# EAGLE board motherboard (EAGLE 7.7.0), part 1 of 3
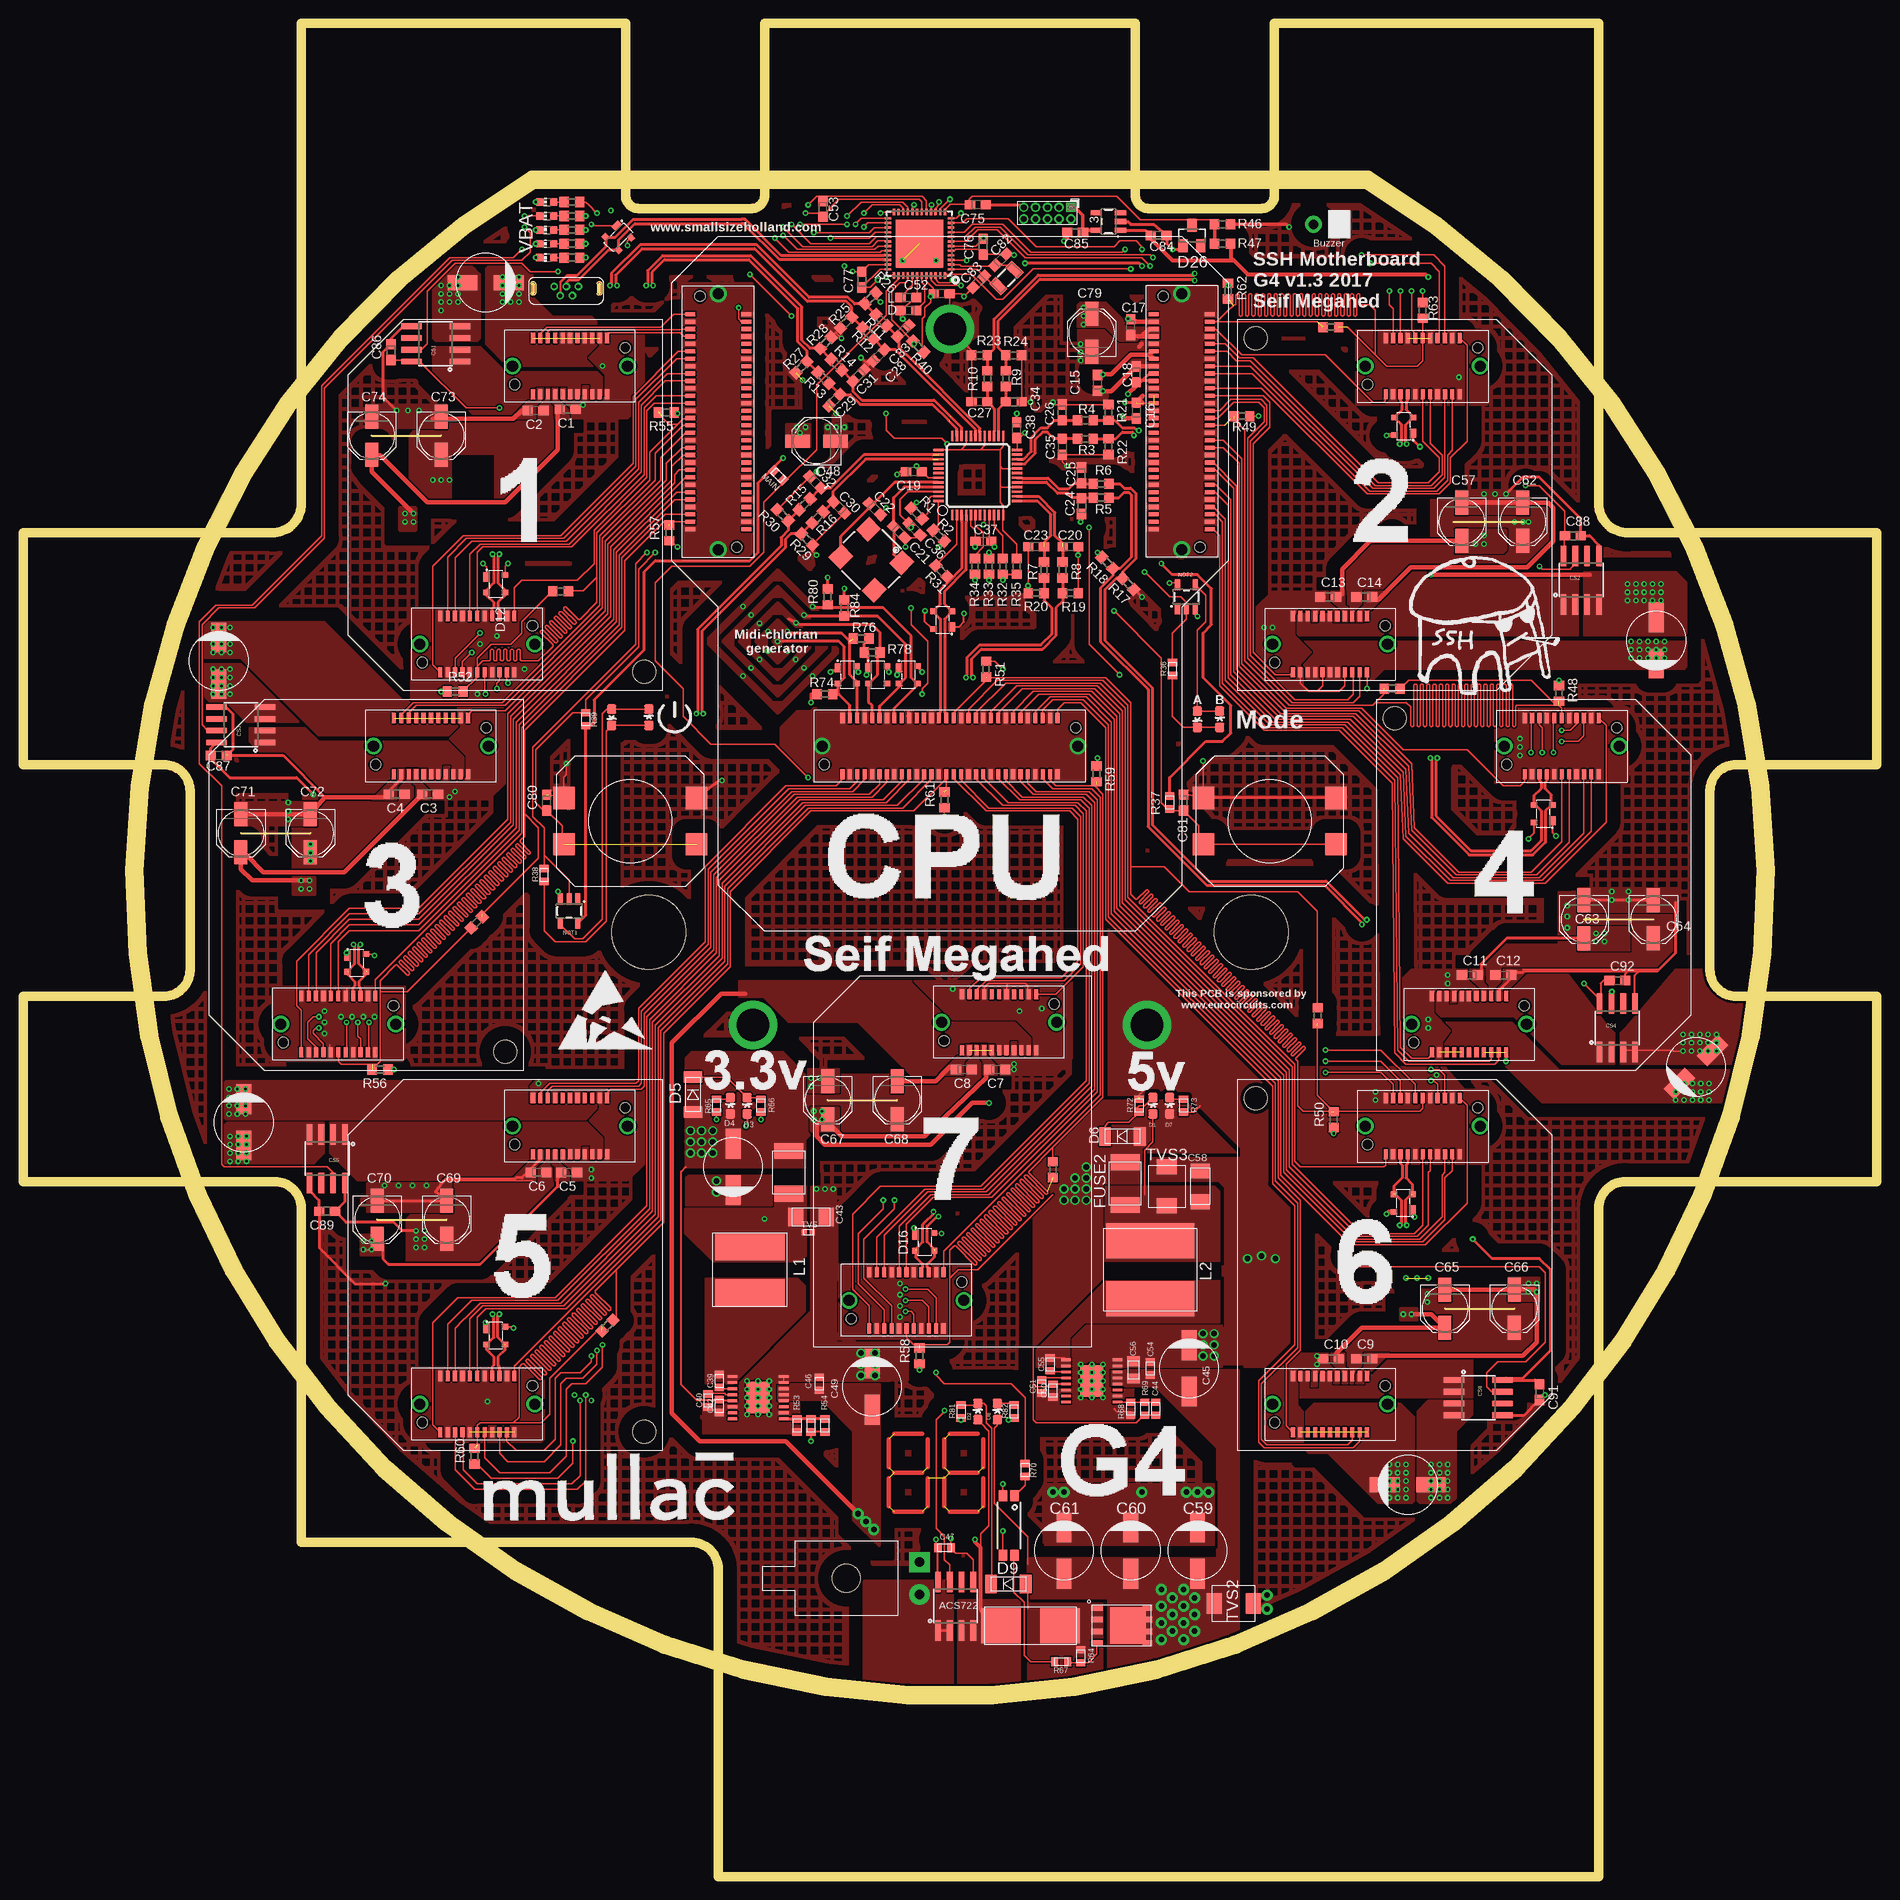
[diagram p0: board, top side]
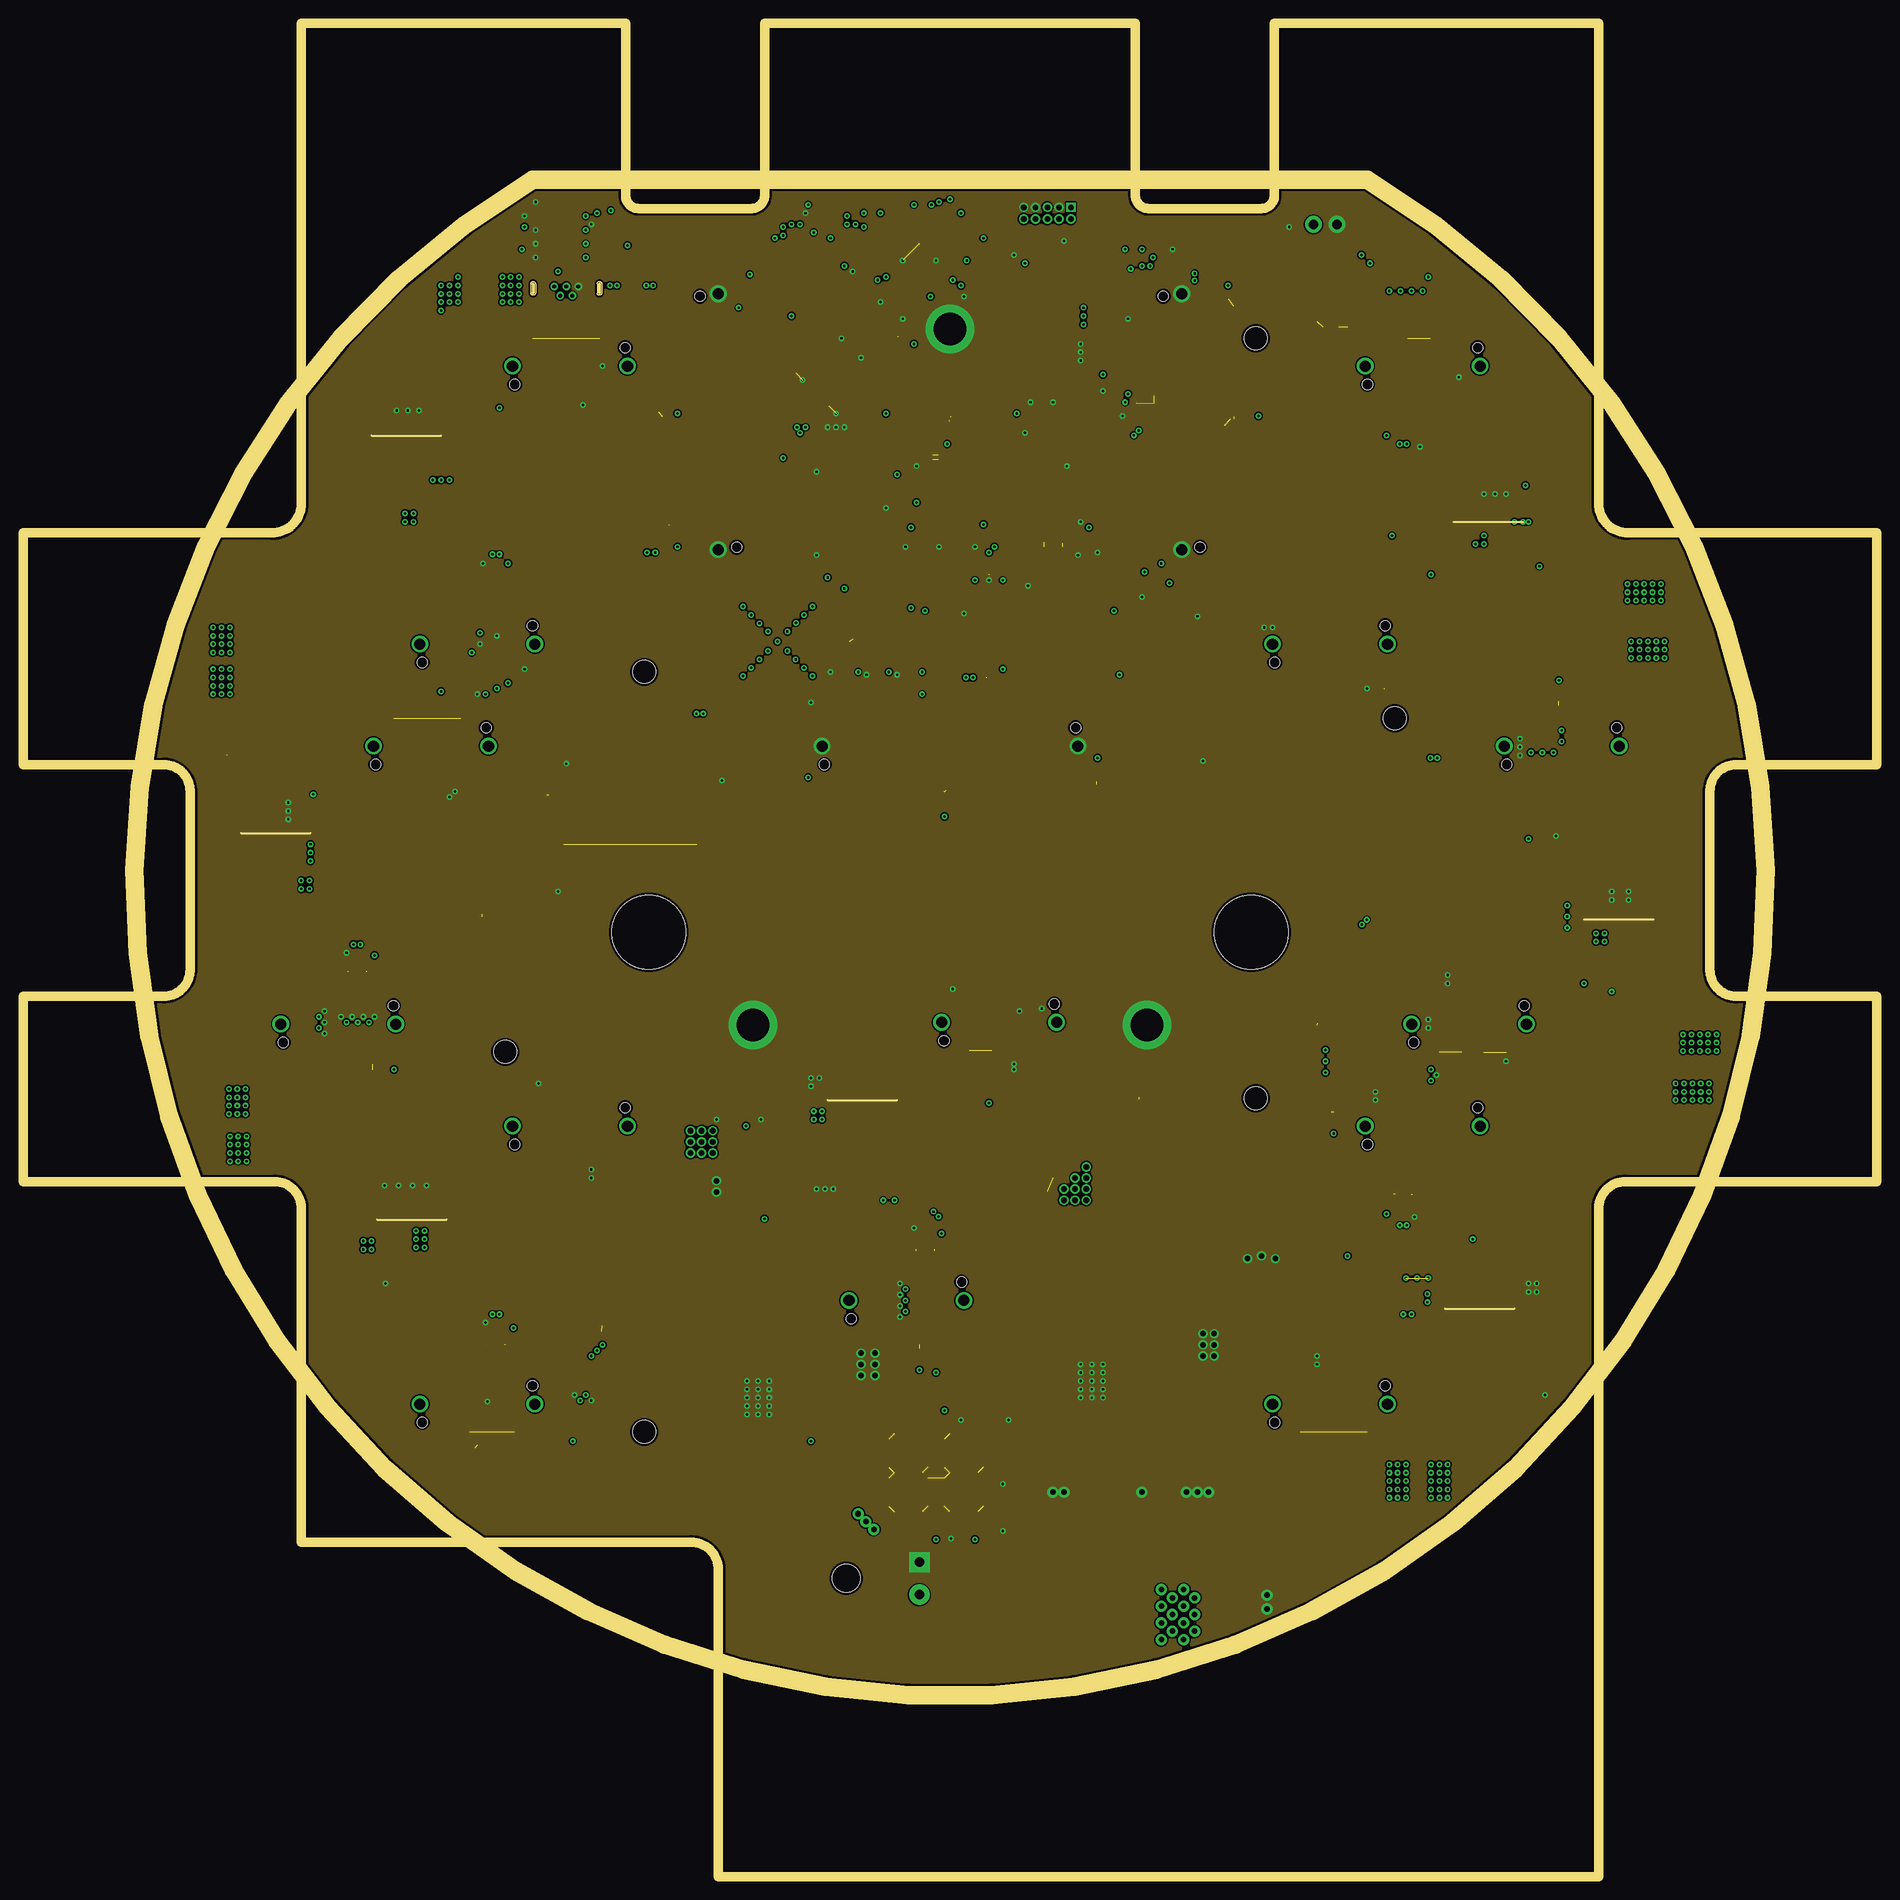
[diagram p1: board, inner layer GND]
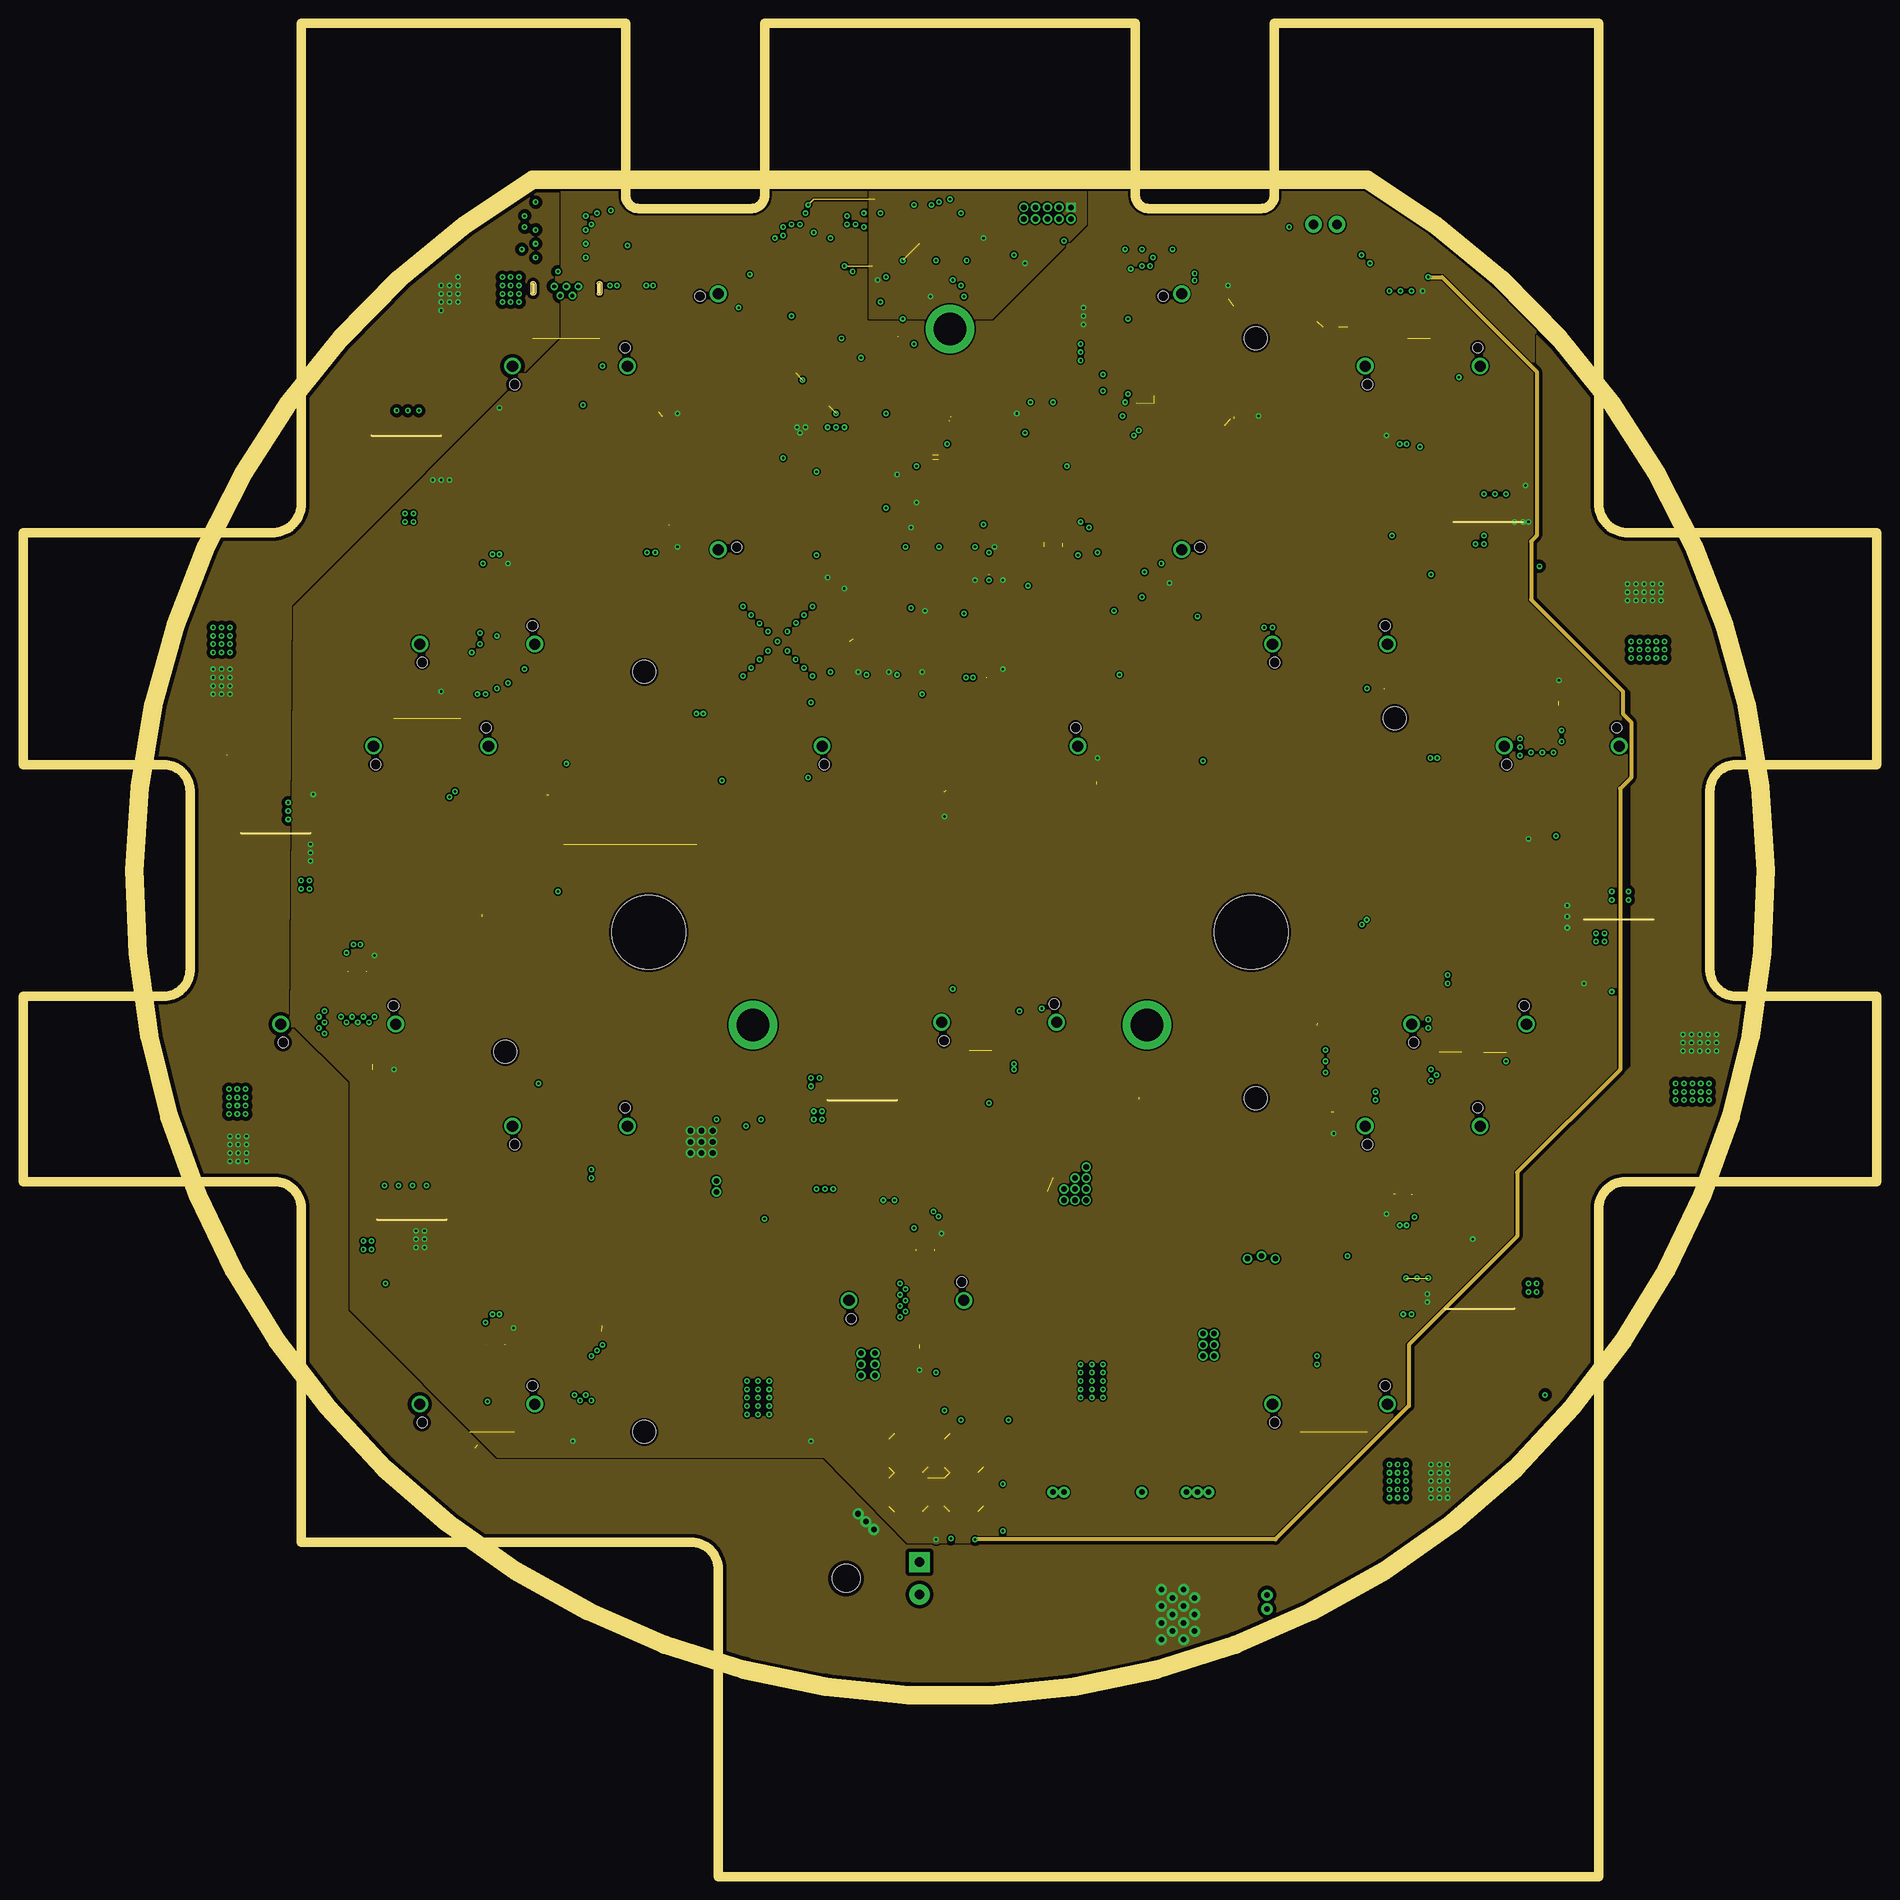
[diagram p2: board, inner layer VCC]
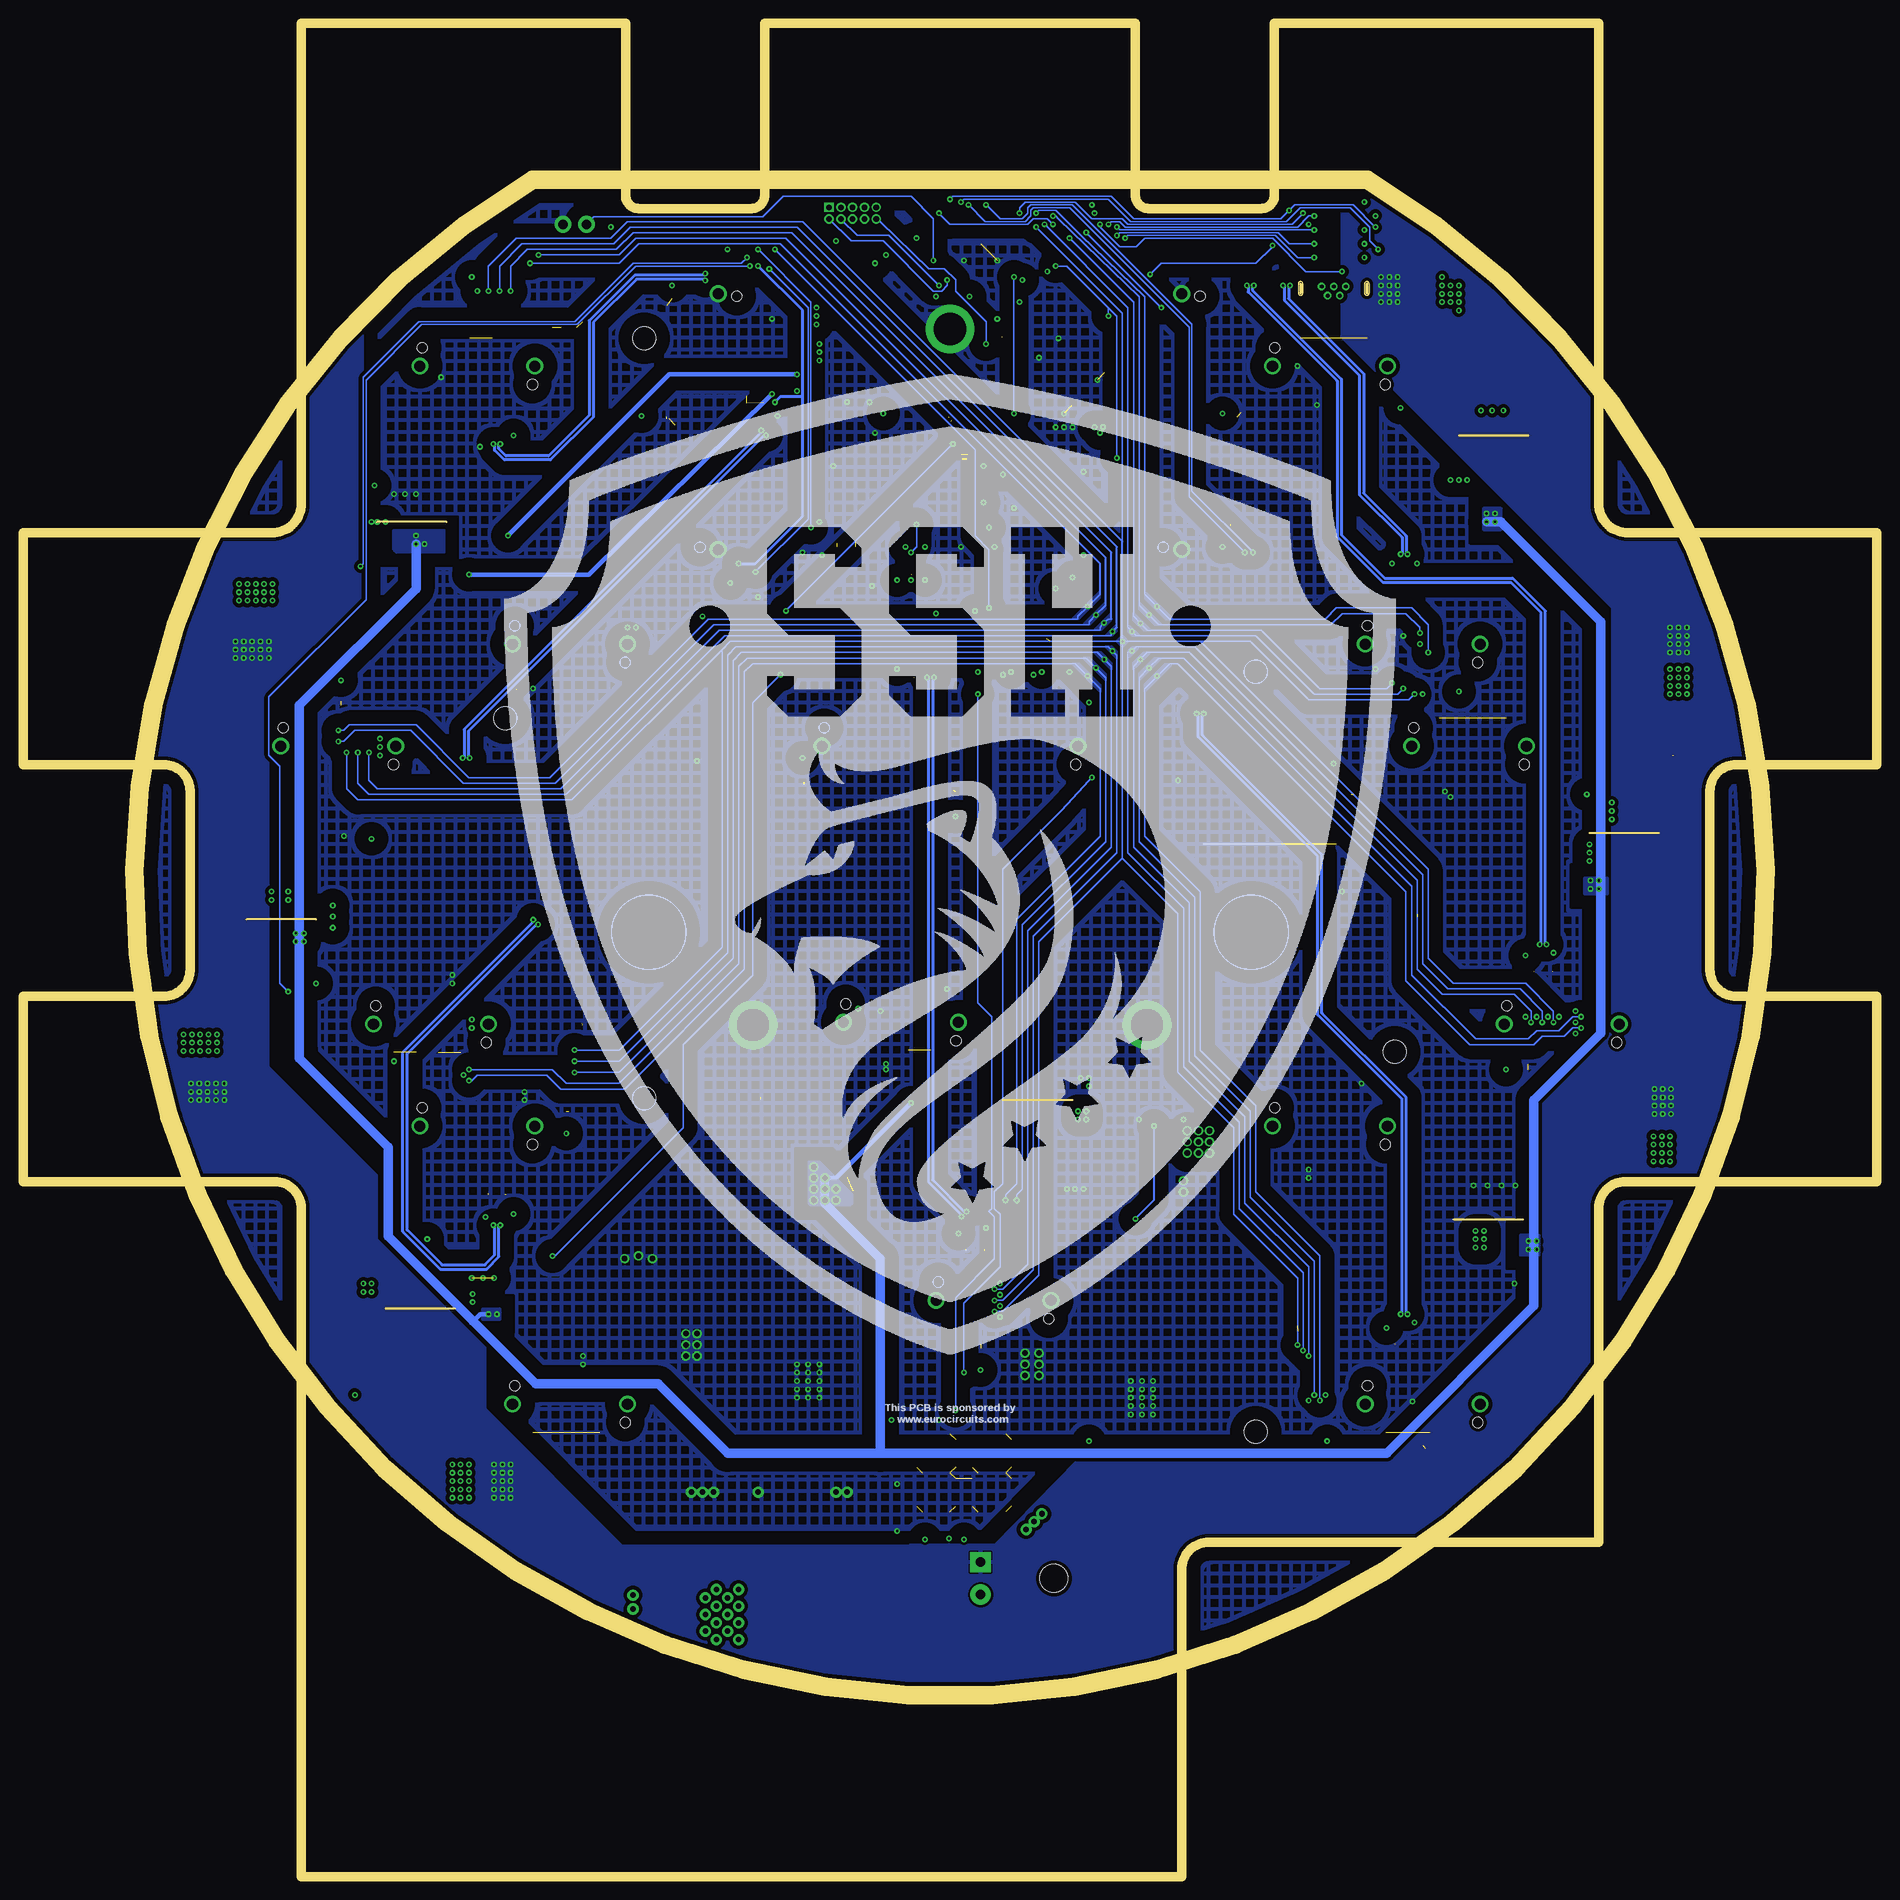
[diagram p3: board, bottom side, seen from below]

Size 200 x 200 mm. Coordinates in mm from the lower left corner, seen from the top.
Outline: 55,183.12 arc298 145,183.12 55,183.12
Outline: 30,36.1 72.1,36.1 arc-90 75,33.2 75,0 170,0 170,72.17 arc-90 172.83,75 200,75 200,95 184.83,95 arc-90 182,97.83 182,117.17 arc-90 184.83,120 200,120 200,145 173.16,145 arc-90 170,148.16 170,200 135,200 135,181.41 arc-90 133.59,180 121.41,180 arc-90 120,181.41 120,200 80,200 80,181.41 arc-90 78.59,180 66.41,180 arc-90 65,181.41 65,200 30,200 30,148.16 arc-90 26.84,145 0,145 0,120 15.17,120 arc-90 18,117.17 18,97.83 arc-90 15.17,95 0,95 0,75 27.17,75 arc-90 30,72.17 30,36.1
Copper layers (1+2*5+16): S1 0.018mm / dielectric 0.2mm / GND 0.035mm / dielectric 0.36mm / VCC 0.035mm / dielectric 0.2mm / S2 0.018mm
Design rules "eC_6Layer_PClass6_BaseCopperO18-I35_eCDefault *": minimum track width 0.15mm, minimum drill 0.25mm, track to track 0.15mm, track to pad 0.15mm, pad to pad 0.15mm, via to via 0.15mm, smd to smd 0mil, copper to edge 0.25mm, drill to drill 0.35mm, minimum pad ring 0.175mm, minimum via ring 0.125mm, stop-mask expansion 0mil, vias tented up to drill 0.45mm, thermal gap 0.2mm
Net classes: 1 Differential: width 0.3 mm, drill 0.2 mm, clearance 0.15 mm
Holes 8 mm at 67.5,101.9 132.5,101.9
tRestrict: area 46.3,148 to 50.8,153.4; area 53,24 to 74,35; area 17,56 to 29,74; area 9,96 to 17,119; area 21,146 to 29,159; area 183,97 to 192,119; area 171,56 to 183,74; area 171.7,147.1 to 176.2,152.5
Milling: 7 lines

## Footprints (pad centres in the part's own frame; a part is rotated, then mirrored left to right if it is on the bottom)
SOT23-5 = smd 0.55 x 1.2: 1 -0.95,-1.3; 2 0,-1.3; 3 0.95,-1.3; 4 0.95,1.3; 5 -0.95,1.3
HTSSOP16 = smd 0.3 x 1.05: 1 -2.275,-2.775; 2 -1.625,-2.775; 3 -0.975,-2.775; 4 -0.325,-2.775; 5 0.325,-2.775; 6 0.975,-2.775; 7 1.625,-2.775; 8 2.275,-2.775; 9 2.275,2.775; 10 1.625,2.775; 11 0.975,2.775; 12 0.325,2.775; 13 -0.325,2.775; 14 -0.975,2.775; 15 -1.625,2.775; 16 -2.275,2.775 | smd 3.4 x 2.45: TGND 0,0
CRYSTAL-SMD-7X5 = smd 1.8 x 2: P$1 0,0; P$2 5.08,0; P$3 5.08,4.2; P$4 0,4.2
CAP_0603 = smd 1.1 x 1: 1 -0.85,0; 2 0.85,0
0603 = smd 0.8 x 1: P$1 -0.7,0; P$2 0.7,0
1206 = smd 2 x 1.6: P$1 0,1.65; P$2 0,-1.65
AE_CAP_D = smd 3.2 x 1.6: + 2.5,0; - -2.5,0
PANASONIC_C = smd 2.6 x 1.4: + 2.05,0; - -2.05,0
0805 = smd 1.067 x 1.333: 1 -0.933,0; 2 0.933,0
SWD_PINHEAD_2X05_127 = drill 0.6 pad 1.016 square: 1 -0.635,2.54 | drill 0.6 pad 1.016: 2 0.635,2.54; 3 -0.635,1.27; 4 0.635,1.27; 5 -0.635,0; 6 0.635,0; 7 -0.635,-1.27; 8 0.635,-1.27; 9 -0.635,-2.54; 10 0.635,-2.54
SO08 = smd 0.61 x 2.21: 1 -1.905,-2.616; 2 -0.635,-2.616; 3 0.635,-2.616; 4 1.905,-2.616; 5 1.905,2.616; 6 0.635,2.616; 7 -0.635,2.616; 8 -1.905,2.616
LED-0603 = smd 1 x 1: A 0,-0.877; C 0,0.877
SOD-80 = smd 1.25 x 2: 1 -1.875,0; 2 1.875,0
SOT143B = smd 1 x 0.7: 1 -0.75,-1 | smd 0.6 x 0.7: 2 0.95,-1; 3 0.95,1; 4 -0.95,1
SOT23 = smd 1 x 1.4: 1 -0.95,-1.1; 2 0.95,-1.1; 3 0,1.1
1812 = smd 1.68 x 3.15: 1 -2.3,0; 2 2.3,0
1X02 = drill 1.016 pad 1.8: 1 -1.27,0; 2 1.27,0
WE-PD2SR/7850 = smd 7.5 x 3: 1 0,2.5; 2 0,-2.5
WE-PD2/1054 = smd 9.5 x 3.75: P$1 0,3.125; P$2 0,-3.125
CHIP-LED0603 = smd 0.8 x 0.8: A 0,-0.75; C 0,0.75
SSOP-4 = smd 1.2 x 0.9: 1 -3.2,0.67; 2 -3.2,-0.6; 3 3.2,-0.6; 4 3.2,0.67
RES_0603 = smd 1 x 1.1: 1 -0.85,0; 2 0.85,0
DFN-2 = smd 0.55 x 0.6: 1 -0.425,0; 2 0.425,0
IPC_7531 = smd 1.62 x 2.18: 1 -2.11,0; 2 2.11,0
LQFP-48 = smd 0.254 x 1.143: 1 -2.75,-4.25; 2 -2.25,-4.25; 3 -1.75,-4.25; 4 -1.25,-4.25; 5 -0.75,-4.25; 6 -0.25,-4.25; 7 0.25,-4.25; 8 0.75,-4.25; 9 1.25,-4.25; 10 1.75,-4.25; 11 2.25,-4.25; 12 2.75,-4.25; 25 2.75,4.25; 26 2.25,4.25; 27 1.75,4.25; 28 1.25,4.25; 29 0.75,4.25; 30 0.25,4.25; 31 -0.25,4.25; 32 -0.75,4.25; 33 -1.25,4.25; 34 -1.75,4.25; 35 -2.25,4.25; 36 -2.75,4.25 | smd 1.143 x 0.254: 13 4.25,-2.75; 14 4.25,-2.25; 15 4.25,-1.75; 16 4.25,-1.25; 17 4.25,-0.75; 18 4.25,-0.25; 19 4.25,0.25; 20 4.25,0.75; 21 4.25,1.25; 22 4.25,1.75; 23 4.25,2.25; 24 4.25,2.75; 37 -4.25,2.75; 38 -4.25,2.25; 39 -4.25,1.75; 40 -4.25,1.25; 41 -4.25,0.75; 42 -4.25,0.25; 43 -4.25,-0.25; 44 -4.25,-0.75; 45 -4.25,-1.25; 46 -4.25,-1.75; 47 -4.25,-2.25; 48 -4.25,-2.75
QFN-48-NO-VIAS = smd 0.7 x 0.25: 1 -3.4,2.75; 2 -3.4,2.25; 3 -3.4,1.75; 4 -3.4,1.25; 5 -3.4,0.75; 6 -3.4,0.25; 7 -3.4,-0.25; 8 -3.4,-0.75; 9 -3.4,-1.25; 10 -3.4,-1.75; 11 -3.4,-2.25; 12 -3.4,-2.75; 25 3.4,-2.75; 26 3.4,-2.25; 27 3.4,-1.75; 28 3.4,-1.25; 29 3.4,-0.75; 30 3.4,-0.25; 31 3.4,0.25; 32 3.4,0.75; 33 3.4,1.25; 34 3.4,1.75; 35 3.4,2.25; 36 3.4,2.75 | smd 0.25 x 0.7: 13 -2.75,-3.4; 14 -2.25,-3.4; 15 -1.75,-3.4; 16 -1.25,-3.4; 17 -0.75,-3.4; 18 -0.25,-3.4; 19 0.25,-3.4; 20 0.75,-3.4; 21 1.25,-3.4; 22 1.75,-3.4; 23 2.25,-3.4; 24 2.75,-3.4; 37 2.75,3.4; 38 2.25,3.4; 39 1.75,3.4; 40 1.25,3.4; 41 0.75,3.4; 42 0.25,3.4; 43 -0.25,3.4; 44 -0.75,3.4; 45 -1.25,3.4; 46 -1.75,3.4; 47 -2.25,3.4; 48 -2.75,3.4 | smd 5.15 x 5.15: EP 0,0
SSH-G4-DOCK = smd 1.1 x 0.45: 1GL 11.97,-9; 1GR -18.03,1; 2SL 11.97,-8.2; 2SR -18.03,1.8; 3SL 11.97,-7.4; 3SR -18.03,2.6; 4GL 11.97,-6.6; 4GR -18.03,3.4; 5SL 11.97,-5.8; 5SR -18.03,4.2; 6SL 11.97,-5; 6SR -18.03,5; 7GL 11.97,-4.2; 7GR -18.03,5.8; 8SL 11.97,-3.4; 8SR -18.03,6.6; 9SL 11.97,-2.6; 9SR -18.03,7.4; 10GL 11.97,-1.8; 10GR -18.03,8.2; 11EL 11.97,-1; 11ER -18.03,9; 12EL 18.03,-9; 12ER -11.97,1; 13GL 18.03,-8.2; 13GR -11.97,1.8; 14SL 18.03,-7.4; 14SR -11.97,2.6; 15SL 18.03,-6.6; 15SR -11.97,3.4; 16GL 18.03,-5.8; 16GR -11.97,4.2; 17SL 18.03,-5; 17SR -11.97,5; 18SL 18.03,-4.2; 18SR -11.97,5.8; 19GL 18.03,-3.4; 19GR -11.97,6.6; 20SL 18.03,-2.6; 20SR -11.97,7.4; 21SL 18.03,-1.8; 21SR -11.97,8.2; 22GL 18.03,-1; 22GR -11.97,9 | drill 1.2 pad 1.35: P$1 15,-11.2; P$2 15,1.2; P$23 -15,-1.2; P$24 -15,11.2 | hole 1.1: -13.02,-0.95; -16.98,10.95; 16.98,-10.95; 13.02,0.95 | hole 2.5: -18,-13
SSH-SENSOR-G4-DOCK = smd 1.1 x 0.45: 1GL 11.97,-9; 1GR -18.03,1; 2SL 11.97,-8.2; 2SR -18.03,1.8; 3SL 11.97,-7.4; 3SR -18.03,2.6; 4GL 11.97,-6.6; 4GR -18.03,3.4; 5SL 11.97,-5.8; 5SR -18.03,4.2; 6SL 11.97,-5; 6SR -18.03,5; 7GL 11.97,-4.2; 7GR -18.03,5.8; 8SL 11.97,-3.4; 8SR -18.03,6.6; 9SL 11.97,-2.6; 9SR -18.03,7.4; 10GL 11.97,-1.8; 10GR -18.03,8.2; 11EL 11.97,-1; 11ER -18.03,9; 12EL 18.03,-9; 12ER -11.97,1; 13GL 18.03,-8.2; 13GR -11.97,1.8; 14SL 18.03,-7.4; 14SR -11.97,2.6; 15SL 18.03,-6.6; 15SR -11.97,3.4; 16GL 18.03,-5.8; 16GR -11.97,4.2; 17SL 18.03,-5; 17SR -11.97,5; 18SL 18.03,-4.2; 18SR -11.97,5.8; 19GL 18.03,-3.4; 19GR -11.97,6.6; 20SL 18.03,-2.6; 20SR -11.97,7.4; 21SL 18.03,-1.8; 21SR -11.97,8.2; 22GL 18.03,-1; 22GR -11.97,9 | drill 1.2 pad 1.35: P$1 15,-11.2; P$2 15,1.2; P$23 -15,-1.2; P$24 -15,11.2 | hole 1.1: -13.02,-0.95; -16.98,10.95; 16.98,-10.95; 13.02,0.95
SSH-CPU-DOCK = smd 1.1 x 0.45: 1 -28.03,-11.6; 2 -28.03,-10.8; 3 -28.03,-10; 4 -28.03,-9.2; 5 -28.03,-8.4; 6 -28.03,-7.6; 7 -28.03,-6.8; 8 -28.03,-6; 9 -28.03,-5.2; 10 -28.03,-4.4; 11 -28.03,-3.6; 12 -28.03,-2.8; 13 -28.03,-2; 14 -28.03,-1.2; 15 -28.03,-0.4; 16 -28.03,0.4; 17 -28.03,1.2; 18 -28.03,2; 19 -28.03,2.8; 20 -28.03,3.6; 21 -28.03,4.4; 22 -28.03,5.2; 23 -28.03,6; 24 -28.03,6.8; 25 -28.03,7.6; 26 -28.03,8.4; 27 -28.03,9.2; 28 -28.03,10; 29 -28.03,10.8; 30 -28.03,11.6; 31 -21.97,-11.6; 32 -21.97,-10.8; 33 -21.97,-10; 34 -21.97,-9.2; 35 -21.97,-8.4; 36 -21.97,-7.6; 37 -21.97,-6.8; 38 -21.97,-6; 39 -21.97,-5.2; 40 -21.97,-4.4; 41 -21.97,-3.6; 42 -21.97,-2.8; 43 -21.97,-2; 44 -21.97,-1.2; 45 -21.97,-0.4; 46 -21.97,0.4; 47 -21.97,1.2; 48 -21.97,2; 49 -21.97,2.8; 50 -21.97,3.6; 51 -21.97,4.4; 52 -21.97,5.2; 53 -21.97,6; 54 -21.97,6.8; 55 -21.97,7.6; 56 -21.97,8.4; 57 -21.97,9.2; 58 -21.97,10; 59 -21.97,10.8; 60 -21.97,11.6; 121 28.03,11.6; 122 28.03,10.8; 123 28.03,10; 124 28.03,9.2; 125 28.03,8.4; 126 28.03,7.6; 127 28.03,6.8; 128 28.03,6; 129 28.03,5.2; 130 28.03,4.4; 131 28.03,3.6; 132 28.03,2.8; 133 28.03,2; 134 28.03,1.2; 135 28.03,0.4; 136 28.03,-0.4; 137 28.03,-1.2; 138 28.03,-2; 139 28.03,-2.8; 140 28.03,-3.6; 141 28.03,-4.4; 142 28.03,-5.2; 143 28.03,-6; 144 28.03,-6.8; 145 28.03,-7.6; 146 28.03,-8.4; 147 28.03,-9.2; 148 28.03,-10; 149 28.03,-10.8; 150 28.03,-11.6; 151 21.97,11.6; 152 21.97,10.8; 153 21.97,10; 154 21.97,9.2; 155 21.97,8.4; 156 21.97,7.6; 157 21.97,6.8; 158 21.97,6; 159 21.97,5.2; 160 21.97,4.4; 161 21.97,3.6; 162 21.97,2.8; 163 21.97,2; 164 21.97,1.2; 165 21.97,0.4; 166 21.97,-0.4; 167 21.97,-1.2; 168 21.97,-2; 169 21.97,-2.8; 170 21.97,-3.6; 171 21.97,-4.4; 172 21.97,-5.2; 173 21.97,-6; 174 21.97,-6.8; 175 21.97,-7.6; 176 21.97,-8.4; 177 21.97,-9.2; 178 21.97,-10; 179 21.97,-10.8; 180 21.97,-11.6 | smd 0.45 x 1.1: 61 11.6,-38.03; 62 10.8,-38.03; 63 10,-38.03; 64 9.2,-38.03; 65 8.4,-38.03; 66 7.6,-38.03; 67 6.8,-38.03; 68 6,-38.03; 69 5.2,-38.03; 70 4.4,-38.03; 71 3.6,-38.03; 72 2.8,-38.03; 73 2,-38.03; 74 1.2,-38.03; 75 0.4,-38.03; 76 -0.4,-38.03; 77 -1.2,-38.03; 78 -2,-38.03; 79 -2.8,-38.03; 80 -3.6,-38.03; 81 -4.4,-38.03; 82 -5.2,-38.03; 83 -6,-38.03; 84 -6.8,-38.03; 85 -7.6,-38.03; 86 -8.4,-38.03; 87 -9.2,-38.03; 88 -10,-38.03; 89 -10.8,-38.03; 90 -11.6,-38.03; 91 11.6,-31.97; 92 10.8,-31.97; 93 10,-31.97; 94 9.2,-31.97; 95 8.4,-31.97; 96 7.6,-31.97; 97 6.8,-31.97; 98 6,-31.97; 99 5.2,-31.97; 100 4.4,-31.97; 101 3.6,-31.97; 102 2.8,-31.97; 103 2,-31.97; 104 1.2,-31.97; 105 0.4,-31.97; 106 -0.4,-31.97; 107 -1.2,-31.97; 108 -2,-31.97; 109 -2.8,-31.97; 110 -3.6,-31.97; 111 -4.4,-31.97; 112 -5.2,-31.97; 113 -6,-31.97; 114 -6.8,-31.97; 115 -7.6,-31.97; 116 -8.4,-31.97; 117 -9.2,-31.97; 118 -10,-31.97; 119 -10.8,-31.97; 120 -11.6,-31.97 | drill 1.2 pad 1.35: P$1 13.8,-35; P$2 -13.8,-35; P$3 25,13.8; P$4 25,-13.8; P$23 -25,-13.8; P$24 -25,13.8 | hole 1.1: -23.02,-13.55; -26.98,13.55; 13.55,-33.02; -13.55,-36.98; 23.02,13.55; 26.98,-13.55
OMNI_BLOK = smd 4.25 x 3.81: P$1 -3.185,0; P$2 3.185,0
POWERPAK_SO-8 = smd 1.27 x 0.61: 1 -3.048,2.235; 2 -3.048,0.965; 3 -3.048,-0.318; 4 -3.048,-1.587 | smd 1.02 x 0.61: 5 2.417,-1.587; 6 2.417,-0.318; 7 2.417,0.953; 8 2.417,2.235 | smd 3.81 x 3.91: EP 0.312,0.318
TACT12X12 = smd 2.3 x 2.4: 1 7.15,-2.5; 2 -7.15,-2.5; 3 7.15,2.5; 4 -7.15,2.5
USB-MICRO-3131-V = drill 0.4 pad 0.8: 1 -1.3,0.5; 2 -0.65,-0.5; 3 0,0.5; 4 0.65,-0.5; 5 1.3,0.5
MOLEX_2_RIGHT = drill 1.02 pad 2.184 square: 1 1.75,0 | drill 1.02 pad 2.184: 2 -1.75,0 | hole 3.05: 0,7.91
CRYSTAL-SMD-3.2X1.5MM = smd 1 x 1.8: P$1 -1.25,0; P$2 1.25,0

## Placement (x,y rotation side)
3  http://nl.farnell.com/texas-instruments/tps709b33dbvt/ldo-fixed-3-3v-0-15a-sot-23-5/dp/2527035  [SOT23-5]  117.1,178.6 90 top
3.3V  LM43603  [HTSSOP16]  79.3,51.7 270 top
5V  LM43603  [HTSSOP16]  115.3,53.5 270 top
6MHZ  OSCILLATORSMD  [CRYSTAL-SMD-7X5]  94.79,141.8 135 top
C1  100n  [CAP_0603]  58.75,158.35 180 top
C2  100n  [CAP_0603]  55.3,158.2 180 top
C3  100n  [CAP_0603]  43.9,116.8 180 top
C4  100n  [CAP_0603]  40.3,116.8 180 top
C5  100n  [CAP_0603]  58.9,76 180 top
C6  100n  [CAP_0603]  55.6,76 180 top
C7  100n  [CAP_0603]  105.1,87.1 180 top
C8  100n  [CAP_0603]  101.5,87.1 180 top
C9  100n  [CAP_0603]  144.7,55.9 0 top
C10  100n  [CAP_0603]  141.1,55.9 0 top
C11  100n  [CAP_0603]  156.1,97.3 0 top
C12  100n  [CAP_0603]  159.7,97.3 0 top
C13  100n  [CAP_0603]  140.8,138.1 0 top
C14  100n  [CAP_0603]  144.7,138.1 0 top
C15  100n  [CAP_0603]  115.9,161.2 270 top
C16  100n  [CAP_0603]  120.1,158.2 270 top
C17  100n  [CAP_0603]  119.5,167.2 90 top
C18  100n  [CAP_0603]  120.1,162.1 90 top
C19  .1u  [CAP_0603]  96.1,151.6 180 top
C20  22p  [CAP_0603]  113,143.5 180 top
C21  22pF  [CAP_0603]  94.51,145.09 135 top
C22  22pF  [CAP_0603]  91.9,147.58 135 top
C23  22p  [CAP_0603]  109.3,143.5 180 top
C24  22p  [CAP_0603]  114.2,147.9 270 top
C25  22p  [CAP_0603]  114.2,151.2 90 top
C26  22p  [CAP_0603]  112.1,158 90 top
C27  22p  [CAP_0603]  103.18,159.16 180 top
C28  22p  [CAP_0603]  92.33,164.17 225 top
C29  22p  [CAP_0603]  87.54,159.32 225 top
C30  22p  [CAP_0603]  88.03,147.77 315 top
C31  22p  [CAP_0603]  90.12,161.97 45 top
C32  22p  [CAP_0603]  85.48,150.46 135 top
C33  22p  [CAP_0603]  94.95,166.78 45 top
C34  22p  [CAP_0603]  106.88,159.16 0 top
C35  22p  [CAP_0603]  112.1,154.3 270 top
C36  .1u  [CAP_0603]  96.19,145.39 135 top
C37  .1u  [CAP_0603]  103.6,144.1 0 top
C38  .1u  [CAP_0603]  107.2,156.1 90 top
C39  470nF  [0603]  75.1,53.5 90 top
C40  2.2uF  [0603]  73.9,51.4 90 top
C41  33pF  [0603]  85,48.7 90 top
C42  1uF  [0603]  75.1,50.8 90 top
C43  150uF  [1206]  85,71.2 270 top
C44  44pF  [0603]  122.2,50.5 90 top
C45  100uF  [AE_CAP_D]  125.8,54.85 270 top
C46  100nF  [0603]  85.9,53.2 270 top
C47  .1u  [0603]  99.4,35.5 180 top
C48  EEEHD1C470AP  [PANASONIC_C]  85.6,154.9 180 top
C49  100uF  [AE_CAP_D]  91.6,52.9 270 top
C50  1uF  [0603]  111.1,52.45 90 top
C51  2.2uF  [0603]  109.9,52.9 90 top
C52  .1u  [CAP_0603]  99.1,170.8 180 top
C53  .1u  [CAP_0603]  86.3,179.97 90 top
C54  100nF  [0603]  121.6,54.85 270 top
C55  470nF  [0603]  110.8,55.3 90 top
C56  6.8uF  [0805]  119.8,54.7 270 top
C57  47u  [PANASONIC_C]  155.2,146.2 270 top
C58  150uF  [1206]  127,74.5 0 top
C59  100u  [AE_CAP_D]  126.7,35.2 270 top
C60  100u  [AE_CAP_D]  119.5,35.2 270 top
C61  100u  [AE_CAP_D]  112.3,35.2 270 top
C62  47u  [PANASONIC_C]  161.8,146.2 270 top
C63  47u  [PANASONIC_C]  168.4,103.3 270 top
C64  47u  [PANASONIC_C]  175.9,103.3 270 top
C65  47u  [PANASONIC_C]  153.4,61.3 270 top
C66  47u  [PANASONIC_C]  160.9,61.3 270 top
C67  47u  [PANASONIC_C]  86.8,83.8 270 top
C68  47u  [PANASONIC_C]  94.3,83.8 270 top
C69  47u  [PANASONIC_C]  45.7,70.9 270 top
C70  47u  [PANASONIC_C]  38.2,70.9 270 top
C71  47u  [PANASONIC_C]  23.5,112.6 270 top
C72  47u  [PANASONIC_C]  31,112.6 270 top
C73  47uF  [PANASONIC_C]  45.1,155.5 270 top
C74  47u  [PANASONIC_C]  37.6,155.5 270 top
C75  .1u  [CAP_0603]  103,180.4 180 top
C76  .1u  [CAP_0603]  103.6,175.9 90 top
C77  .1u  [CAP_0603]  90.49,172.34 270 top
C79  47u  [PANASONIC_C]  115.3,166.6 90 top
C80  .1u  [CAP_0603]  56.5,115.9 90 top
C81  .1u  [CAP_0603]  125.2,115.9 90 top
C82  22p  [CAP_0603]  105.49,174.49 225 top
C83  22p  [CAP_0603]  103.09,172.09 45 top
C84  1u  [CAP_0603]  122.5,177.1 180 top
C85  2.2u  [CAP_0603]  113.5,177.4 0 top
C86  100n  [CAP_0603]  39.7,164.5 90 top
C87  100n  [CAP_0603]  21.1,121 0 top
C88  100n  [CAP_0603]  167.2,144.7 0 top
C89  100n  [CAP_0603]  32.8,71.8 180 top
C91  100n  [CAP_0603]  163.6,52.3 270 top
C92  100n  [CAP_0603]  172,96.7 0 top
CN1  [SWD_PINHEAD_2X05_127]  110.5,179.5 270 top
CS0  ACS712  [SO08]  100.6,29.2 0 top
CS1  ACS712  [SO08]  44.5,165.4 90 top
CS2  ACS712  [SO08]  168.1,139.9 0 top
CS3  ACS712  [SO08]  23.5,124.3 90 top
CS4  ACS712  [SO08]  172,91.6 0 top
CS5  ACS712  [SO08]  32.8,77.5 180 top
CS6  ACS712  [SO08]  157,51.7 270 top
D  .1u  [CAP_0603]  95.5,169 0 top
D1  r  [LED-0603]  121.9,83.2 0 top
D2  r  [LED-0603]  103,50.2 0 top
D3  r  [LED-0603]  78.1,83.2 0 top
D4  g  [LED-0603]  76.3,83.2 0 top
D5  1N4148  [SOD-80]  72.26,84.4 90 top
D6  1N4148  [SOD-80]  118.6,79.9 180 top
D7  g  [LED-0603]  123.7,83.2 0 top
D8  g  [LED-0603]  105.1,50.2 0 top
D9  1N4148  [SOD-80]  106.3,31.6 180 top
D10  PRTR5V0U2X  [SOT143B]  36,98.6 270 top
D11  r  [LED-0603]  63.5,125.1 180 top
D12  PRTR5V0U2X  [SOT143B]  51,139.5 270 top
D13  PRTR5V0U2X  [SOT143B]  148.95,156.5 90 top
D14  PRTR5V0U2X  [SOT143B]  164,114.7 90 top
D15  PRTR5V0U2X  [SOT143B]  148.9,72.7 90 top
D16  PRTR5V0U2X  [SOT143B]  97.3,68.5 270 top
D17  g  [LED-0603]  67.5,125.1 0 top
D18  PRTR5V0U2X  [SOT143B]  51,58.4 270 top
D19  PRTR5V0U2X  [SOT143B]  99.2,135.6 90 top
D20  g  [LED-0603]  126.7,124.9 180 top
D21  g  [LED-0603]  129.1,124.9 0 top
D22  PRTR5V0U2X  [SOT143B]  64.21,176.89 225 top
D23  PRTR5V0U2X  [SOT143B]  88.9,129.7 270 top
D24  PRTR5V0U2X  [SOT143B]  92.2,129.7 270 top
D25  PRTR5V0U2X  [SOT143B]  95.5,129.7 270 top
D26  http://nl.farnell.com/diodes-inc/dz23c3v3-7-f/diode-dual-zener-3-3v-0-3w-sot23/dp/1773580  [SOT23]  126.1,177.1 0 top
FUSE1  2.5A 600mV  [1812]  82.6,76 270 top
FUSE2  2.5A 600mV  [1812]  118.9,74.8 270 top
JP1  [1X02]  140.5,178.3 180 top
L  .1u  [CAP_0603]  95.5,170.4 180 top
L1  6.8uH  [WE-PD2SR/7850]  78.4,65.5 180 top
L2  10uH  [WE-PD2/1054]  121.6,65.5 0 top
LED1  g  [CHIP-LED0603]  56.5,180.7 90 top
LED2  g  [CHIP-LED0603]  56.5,179.2 90 top
LED3  g  [CHIP-LED0603]  56.5,177.7 90 top
LED4  g  [CHIP-LED0603]  56.5,176.2 90 top
LED5  g  [CHIP-LED0603]  56.5,174.7 90 top
MAIN  0  [0603]  81.49,151.21 135 top
NOT1  NOT_GATE7404_SOT23-5  [SOT23-5]  58.9,104.2 180 top
NOT2  NOT_GATE7404_SOT23-5  [SOT23-5]  125.5,138.1 0 top
OPTO1  TCMT1103-OPTO  [SSOP-4]  106.3,37.9 270 top
R1  15k  [RES_0603]  96.4,147.1 315 top
R2  15k  [RES_0603]  98.8,144.7 135 top
R3  27  [RES_0603]  114.6,155.16 180 top
R4  27  [RES_0603]  114.6,157.16 180 top
R5  27  [RES_0603]  116.3,148.8 180 top
R6  27  [RES_0603]  116.3,150.3 180 top
R7  27  [RES_0603]  110.15,141 90 top
R8  27  [RES_0603]  112.15,141 270 top
R9  27  [RES_0603]  106.03,161.66 90 top
R10  27  [RES_0603]  104.03,161.66 270 top
R11  27  [RES_0603]  92.58,167.95 135 top
R12  27  [RES_0603]  91.17,166.54 315 top
R13  27  [RES_0603]  86.34,161.73 315 top
R14  27  [RES_0603]  87.76,163.14 315 top
R15  27  [RES_0603]  84.31,148.09 225 top
R16  27  [RES_0603]  85.72,146.68 45 top
R17  15k  [RES_0603]  119.22,139.5 315 top
R18  15k  [RES_0603]  116.97,141.77 135 top
R19  15k  [RES_0603]  113,138.5 0 top
R20  15k  [RES_0603]  109.3,138.5 180 top
R21  15k  [RES_0603]  117.1,158 90 top
R22  15k  [RES_0603]  117.1,154.3 270 top
R23  15k  [RES_0603]  103.18,164.16 180 top
R24  15k  [RES_0603]  106.88,164.16 0 top
R25  15k  [RES_0603]  88.8,167.7 225 top
R26  15k  [RES_0603]  91.41,170.32 45 top
R27  15k  [RES_0603]  83.97,162.89 225 top
R28  15k  [RES_0603]  86.59,165.51 45 top
R29  15k  [RES_0603]  84.56,144.3 315 top
R30  15k  [RES_0603]  81.94,146.92 135 top
R31  1k5  [RES_0603]  99.06,140.89 135 top
R32  15k  [RES_0603]  105.7,141.4 90 top
R33  15k  [RES_0603]  104.2,141.4 90 top
R34  15k  [RES_0603]  102.7,141.4 270 top
R35  15k  [RES_0603]  107.2,141.4 90 top
R36  1k  [0603]  124,130.3 90 top
R37  15k  [0603]  123.7,115.9 270 top
R38  1k  [0603]  56.2,108.1 90 top
R39  15k  [0603]  60.7,124.9 270 top
R40  15k  [RES_0603]  96.58,165.1 135 top
R41  1k  [RES_0603]  59.2,180.7 180 top
R42  1k  [RES_0603]  59.2,179.2 180 top
R43  1k  [RES_0603]  59.2,177.7 180 top
R44  1k  [RES_0603]  59.2,176.2 180 top
R45  1k  [RES_0603]  59.2,174.7 180 top
R46  15k  [RES_0603]  129.4,178.3 0 top
R47  100k  [RES_0603]  129.4,176.2 180 top
R48  15k  [RES_0603]  165.7,127.7 270 top
R49  15k  [RES_0603]  131.5,157.6 180 top
R50  15k  [RES_0603]  141.4,81.7 90 top
R51  15k  [RES_0603]  103.9,130.3 270 top
R52  15k  [RES_0603]  46.6,127.9 0 top
R53  442k  [0603]  83.5,48.7 90 top
R54  1M  [0603]  86.5,48.7 90 top
R55  15k  [RES_0603]  69.4,158 180 top
R56  15k  [RES_0603]  38.5,87.1 180 top
R57  15k  [RES_0603]  69.7,145 90 top
R58  15k  [RES_0603]  96.7,56.2 90 top
R59  15k  [RES_0603]  115.8,119 270 top
R60  15k  [RES_0603]  48.7,45.4 90 top
R61  15k  [RES_0603]  99.4,116.2 90 top
R62  15k  [RES_0603]  130,171.1 270 top
R63  15k  [RES_0603]  151,169 270 top
R64  100k  [0603]  114.1,23.8 90 top
R65  150R  [0603]  74.8,83.2 90 top
R66  150R  [0603]  79.6,83.2 90 top
R67  68k  [0603]  112,23.2 180 top
R68  255k  [0603]  119.5,50.5 90 top
R69  1M  [0603]  121,50.5 90 top
R70  330  [0603]  108.1,43.9 270 top
R71  0  [RES_0603]  58,138.7 180 top
R72  330R  [0603]  120.4,83.2 270 top
R73  330R  [0603]  125.2,83.2 90 top
R74  15k  [RES_0603]  86.5,127.6 0 top
R75  0  [RES_0603]  48.93,102.98 45 top
R76  15k  [RES_0603]  90.4,133.6 180 top
R77  0  [RES_0603]  141.1,167.2 180 top
R78  15k  [RES_0603]  91.6,132.1 0 top
R79  0  [RES_0603]  63.04,59.48 45 top
R80  15k  [RES_0603]  86.8,138.1 90 top
R81  1k6  [0603]  101.2,50.2 90 top
R82  1k6  [0603]  106.9,50.2 90 top
R83  0  [RES_0603]  139.68,92.92 90 top
R84  15k  [RES_0603]  88.6,136.9 90 top
R85  0  [RES_0603]  147.7,128.2 180 top
R87  0  [RES_0603]  111.1,76.3 90 top
TVS  DFN-2  [DFN-2]  84.7,69.55 0 top
TVS2  SMBJ18CA-TR  [IPC_7531]  130.6,29.5 180 top
TVS3  SMBJ18CA-TR  [IPC_7531]  123.4,74.5 90 top
U1  TUSB2077ALQFP-48  [LQFP-48]  103,151.2 0 top
U2  ATSAMLQFN-48-NO-VIA  [QFN-48-NO-VIAS]  96.7,176.2 180 top
U$1  [SSH-G4-DOCK]  54,66 90 top
U$2  [SSH-G4-DOCK]  146,66 270 top
U$3  [SSH-SENSOR-G4-DOCK]  100.3,77.2 90 top
U$4  SSH-G4-CPUDOCK  [SSH-CPU-DOCK]  100,157 0 top
U$5  [SSH-G4-DOCK]  39,107 90 top
U$6  [SSH-G4-DOCK]  161,107 270 top
U$7  [SSH-G4-DOCK]  54,148 90 top
U$8  [SSH-G4-DOCK]  146,148 270 top
U$10  [ESD_10.00]  57.7,89.2 0 top
U$11  100u  [AE_CAP_D]  176.2,133.4 90 top
U$12  100u  [AE_CAP_D]  180.49,87.39 45 top
U$13  100u  [AE_CAP_D]  149.4,42.3 0 top
U$14  100u  [AE_CAP_D]  23.8,81.4 270 top
U$15  [SSH_LOGO]  83.49,172.15 0 top
U$16  100u  [AE_CAP_D]  21.1,131.2 270 top
U$17  100u  [AE_CAP_D]  49.9,172 180 top
U$18  [LOGO]  62.5,40.9 0 top
U$26  FUSELITTLE_FUSE_OMNIBLOK  [OMNI_BLOK]  108.7,27.1 0 top
U$30  MOSFETSIR401DP  [POWERPAK_SO-8]  118.9,26.8 0 top
U$31  http://nl.mouser.com/ProductDetail/Omron-Electronics/B3FS-4052P/?qs=sGAEpiMZZMsgGjVA3toVBL1indp2geJfyyO2cWVY0Hg%3d  [TACT12X12]  65.5,113.9 0 top
U$32  http://nl.mouser.com/ProductDetail/Omron-Electronics/B3FS-4052P/?qs=sGAEpiMZZMsgGjVA3toVBL1indp2geJfyyO2cWVY0Hg%3d  [TACT12X12]  134.5,113.9 0 top
U$37  100u  [AE_CAP_D]  76.6,76.6 90 top
USB1  USB-CON-5PINVERTICAL  [USB-MICRO-3131-V]  58.6,171.1 0 top
VCC  Battery  [MOLEX_2_RIGHT]  96.7,32.2 90 top
X2  CRYSTAL3.2X1.5MM  [CRYSTAL-SMD-3.2X1.5MM]  106.09,172.51 225 top

## Library data of the parts
3 C1-C38 C52 C53 C75-C77 C80-C89 C91 C92 CN1 D D10 D12-D16 D18 D19 D22-D25 L NOT1 NOT2 R1-R35 R40-R52 R55-R63 R71 R74-R80 R83-R85 R87 U1 U2 U$1-U$8 U$15 U$18 U$26 U$30-U$32 USB1 X2 = Mullac
3.3V 5V C39-C47 C49-C51 C54-C56 C58-C61 D5 D6 D9 FUSE1 FUSE2 L1 L2 MAIN R36-R39 R53 R54 R64-R70 R72 R73 R81 R82 TVS TVS2 TVS3 U$11-U$14 U$16 U$17 U$37 VCC = RoboCup
6MHZ = SparkFun-FreqCtrl
C48 C57 C62-C74 C79 = rcl
CS0 CS1-CS6 = SparkFun-AnalogIC; PROD_ID: IC-08964
D1-D4 D7 D8 D11 D17 D20 D21 = SparkFun-LED
D26 = diode
JP1 = pinhead
LED1-LED5 = led
OPTO1 = SparkFun-DiscreteSemi
U$10 = logo

## Nets
+3V1: C43.P$2 D3.A FUSE1.2 L1.2 TVS.1
+3V3: 3.3V.5 C2.1 C4.1 C6.1 C8.1 C9.1 C12.1 C14.1 C17.1 C19.2 C36.2 C37.2 C38.2 C41.P$1 C42.P$2 C47.P$2 C48.+ C62.+ C64.+ C66.+ C68.+ C69.+ C72.+ C73.+ C79.+ C86.1 C87.1 C88.1 C89.1 C91.1 C92.1 CS0.8 CS1.8 CS2.8 CS3.8 CS4.8 CS5.8 CS6.8 D4.A D5.1 D10.4 D12.4 D13.4 D14.4 D15.4 D16.4 D18.4 D19.4 D23.4 D24.4 D25.4 FUSE1.1 NOT2.5 R1.1 R32.1 R34.2 R35.1 R48.1 R49.1 R50.1 R51.1 R52.1 R54.P$1 R55.1 R56.1 R57.1 R58.1 R59.1 R60.1 R61.1 R62.1 R63.1 R80.2 R84.2 U1.9 U1.46 U$1.9SL U$2.9SL U$3.9SL U$4.153 U$4.154 U$5.9SL U$6.9SL U$7.9SL U$8.9SL U$37.+
+5V: 5V.5 C1.2 C3.2 C5.2 C7.2 C10.2 C11.2 C13.2 C15.1 C44.P$1 C50.P$2 C57.+ C63.+ C65.+ C67.+ C70.+ C71.+ C74.+ D6.1 D7.A FUSE2.1 R69.P$1 U$1.8SL U$2.8SL U$3.8SL U$4.156 U$4.157 U$5.8SL U$6.8SL U$7.8SL U$8.8SL
AIN10: U2.47
BAT: CS0.1 CS0.2 VCC.2
BUSPWR: R32.2 U1.10
BUZZER: JP1.2 U2.3
CURRENT1: CS1.7 U2.12
CURRENT2: CS2.7 U2.8
CURRENT3: CS3.7 U2.14
CURRENT4: CS4.7 U2.7
CURRENT5: CS5.7 U2.15
CURRENT6: CS6.7 U2.11
CURRENT_MAIN: CS0.7 U2.9
D: D.2 U2.43
D0_N [Differential]: D19.2 U1.4 U$4.106
D0_P [Differential]: D19.3 R31.1 U1.3 U$4.107
D1.1: U$4.24 U$7.21SR
D1.2: U$4.22 U$7.20SR
D1.3_N: U$4.21 U$7.18SR
D1.4_P: U$4.19 U$7.17SR
D1.5: U$4.18 U$7.12ER
D1.6: U$4.25 U$7.11ER
D1.7: U$4.27 U$7.12EL
D1.8: U$4.28 U$7.20SL
D1.9: U$4.30 U$7.21SL
D1__N [Differential]: C33.1 R11.1 U1.30
D1__P [Differential]: C28.1 R12.2 U1.31
D1_N [Differential]: D12.2 R11.2 R26.1 U$7.15SR
D1_P [Differential]: D12.3 R12.1 R25.1 U$7.14SR
D2.1: U$4.129 U$8.21SR
D2.2: U$4.128 U$8.20SR
D2.3_N: U$4.126 U$8.18SR
D2.4_P: U$4.125 U$8.17SR
D2.5: U$4.123 U$8.12ER
D2.6: U$4.131 U$8.11ER
D2.7: U$4.132 U$8.12EL
D2.8: U$4.134 U$8.20SL
D2.9: U$4.135 U$8.21SL
D2__N [Differential]: C34.1 R9.1 U1.26
D2__P [Differential]: C27.1 R10.2 U1.27
D2_N [Differential]: D13.2 R9.2 R24.1 U$8.15SR
D2_P [Differential]: D13.3 R10.1 R23.1 U$8.14SR
D3.1: U$4.9 U$5.21SR
D3.2: U$4.8 U$5.20SR
D3.3_N: U$4.6 U$5.18SR
D3.4_P: U$4.5 U$5.17SR
D3.5: U$4.3 U$5.12ER
D3.6: U$4.11 U$5.11ER
D3.7: U$4.12 U$5.12EL
D3.8: U$4.14 U$5.20SL
D3.9: U$4.15 U$5.21SL
D3__N [Differential]: C31.1 R14.2 U1.34
D3__P [Differential]: C29.1 R13.2 U1.35
D3_N [Differential]: D10.2 R14.1 R28.1 U$5.15SR
D3_P [Differential]: D10.3 R13.1 R27.1 U$5.14SR
D4.1: U$4.144 U$6.21SR
D4.2: U$4.142 U$6.20SR
D4.3_N: U$4.141 U$6.18SR
D4.4_P: U$4.139 U$6.17SR
D4.5: U$4.138 U$6.12ER
D4.6: U$4.145 U$6.11ER
D4.7: U$4.147 U$6.12EL
D4.8: U$4.148 U$6.20SL
D4.9: U$4.150 U$6.21SL
D4__N [Differential]: C35.1 R3.2 U1.21
D4__P [Differential]: C26.1 R4.2 U1.22
D4_N [Differential]: D14.2 R3.1 R22.1 U$6.15SR
D4_P [Differential]: D14.3 R4.1 R21.1 U$6.14SR
D5.1: U$1.21SR U$4.84
D5.2: U$1.20SR U$4.82
D5.3_N: U$1.18SR U$4.81
D5.4_P: U$1.17SR U$4.79
D5.5: U$1.12ER U$4.78
D5.6: U$1.11ER U$4.85
D5.7: U$1.12EL U$4.87
D5.8: U$1.20SL U$4.88
D5.9: U$1.21SL U$4.90
D5__N [Differential]: C32.1 R15.1 U1.38
D5__P [Differential]: C30.1 R16.2 U1.39
D5_N [Differential]: D18.2 R15.2 R30.1 U$1.15SR
D5_P [Differential]: D18.3 R16.1 R29.1 U$1.14SR
D6.1: U$2.21SR U$4.97
D6.2: U$2.20SR U$4.99
D6.3_N: U$2.18SR U$4.100
D6.4_P: U$2.17SR U$4.102
D6.5: U$2.12ER U$4.103
D6.6: U$2.11ER U$4.96
D6.7: U$2.12EL U$4.94
D6.8: U$2.20SL U$4.93
D6.9: U$2.21SL U$4.91
D6__N [Differential]: C24.1 R5.2 U1.17
D6__P [Differential]: C25.1 R6.2 U1.18
D6_N [Differential]: D15.2 R5.1 R18.1 U$2.15SR
D6_P [Differential]: D15.3 R6.1 R17.1 U$2.14SR
D7.1: U$3.21SR U$4.69
D7.2: U$3.20SR U$4.68
D7.3_N: U$3.18SR U$4.66
D7.4_P: U$3.17SR U$4.65
D7.5: U$3.12ER U$4.63
D7.6: U$3.11ER U$4.71
D7.7: U$3.12EL U$4.72
D7.8: U$3.20SL U$4.74
D7.9: U$3.21SL U$4.75
D7__N [Differential]: C23.1 R7.2 U1.13
D7__P [Differential]: C20.2 R8.1 U1.14
D7_N [Differential]: D16.2 R7.1 R20.1 U$3.15SR
D7_P [Differential]: D16.3 R8.2 R19.1 U$3.14SR
DPUR: R31.2 U1.2
EEDATA: R33.2 U1.8
EN: 3.3
EXTMEM: R1.2 U1.47
GND: 3.2 3.3V.6 3.3V.10 3.3V.15 3.3V.16 3.3V.TGND 5V.6 5V.10 5V.15 5V.16 5V.TGND C1.1 C2.2 C3.1 C4.2 C5.1 C6.2 C7.1 C8.2 C9.2 C10.1 C11.1 C12.2 C13.1 C14.2 C15.2 C16.2 C17.2 C18.2 C19.1 C20.1 C21.1 C22.1 C23.2 C24.2 C25.2 C26.2 C27.2 C28.2 C29.2 C30.2 C31.2 C32.2 C33.2 C34.2 C35.2 C36.1 C37.1 C38.1 C40.P$1 C42.P$1 C43.P$1 C45.- C46.P$1 C47.P$1 C48.- C49.- C50.P$1 C51.P$1 C52.1 C53.1 C54.P$1 C56.1 C57.- C58.P$1 C59.- C60.- C61.- C62.- C63.- C64.- C65.- C66.- C67.- C68.- C69.- C70.- C71.- C72.- C73.- C74.- C75.1 C76.1 C77.1 C79.- C80.2 C81.2 C82.1 C83.1 C84.1 C85.1 C86.2 C87.2 C88.2 C89.2 C91.2 C92.2 CN1.3 CN1.7 CN1.9 CS0.5 CS1.5 CS2.5 CS3.5 CS4.5 CS5.5 CS6.5 D10.1 D12.1 D13.1 D14.1 D15.1 D16.1 D18.1 D19.1 D22.1 D23.1 D24.1 D25.1 D26.1 D.1 JP1.1 L.1 LED1.C LED2.C LED3.C LED4.C LED5.C NOT1.3 NOT2.3 OPTO1.2 OPTO1.3 R2.1 R17.2 R18.2 R19.2 R20.2 R21.2 R22.2 R23.2 R24.2 R25.2 R26.2 R27.2 R28.2 R29.2 R30.2 R33.1 R46.2 R53.P$1 R65.P$1 R66.P$1 R68.P$1 R72.P$1 R73.P$1 R74.1 R76.1 R78.1 R81.P$1 R82.P$1 TVS2.1 TVS3.2 TVS.2 U1.5 U1.24 U1.43 U2.5 U2.18 U2.35 U2.42 U2.EP U$1.1GL U$1.1GR U$1.4GL U$1.4GR U$1.7GL U$1.7GR U$1.10GL U$1.10GR U$1.13GL U$1.13GR U$1.16GL U$1.16GR U$1.19GL U$1.19GR U$1.22GL U$1.22GR U$2.1GL U$2.1GR U$2.4GL U$2.4GR U$2.7GL U$2.7GR U$2.10GL U$2.10GR U$2.13GL U$2.13GR U$2.16GL U$2.16GR U$2.19GL U$2.19GR U$2.22GL U$2.22GR U$3.1GL U$3.1GR U$3.4GL U$3.4GR U$3.7GL U$3.7GR U$3.10GL U$3.10GR U$3.13GL U$3.13GR U$3.16GL U$3.16GR U$3.19GL U$3.19GR U$3.22GL U$3.22GR U$4.1 U$4.4 U$4.7 U$4.10 U$4.13 U$4.17 U$4.20 U$4.23 U$4.26 U$4.29 U$4.32 U$4.35 U$4.38 U$4.41 U$4.44 U$4.48 U$4.51 U$4.54 U$4.57 U$4.60 U$4.61 U$4.64 U$4.67 U$4.70 U$4.73 U$4.77 U$4.80 U$4.83 U$4.86 U$4.89 U$4.92 U$4.95 U$4.98 U$4.101 U$4.104 U$4.108 U$4.111 U$4.114 U$4.117 U$4.120 U$4.121 U$4.124 U$4.127 U$4.130 U$4.133 U$4.137 U$4.140 U$4.143 U$4.146 U$4.149 U$4.152 U$4.155 U$4.158 U$4.161 U$4.164 U$4.168 U$4.171 U$4.174 U$4.177 U$4.180 U$4.P$1 U$4.P$2 U$4.P$3 U$4.P$4 U$4.P$23 U$4.P$24 U$5.1GL U$5.1GR U$5.4GL U$5.4GR U$5.7GL U$5.7GR U$5.10GL U$5.10GR U$5.13GL U$5.13GR U$5.16GL U$5.16GR U$5.19GL U$5.19GR U$5.22GL U$5.22GR U$6.1GL U$6.1GR U$6.4GL U$6.4GR U$6.7GL U$6.7GR U$6.10GL U$6.10GR U$6.13GL U$6.13GR U$6.16GL U$6.16GR U$6.19GL U$6.19GR U$6.22GL U$6.22GR U$7.1GL U$7.1GR U$7.4GL U$7.4GR U$7.7GL U$7.7GR U$7.10GL U$7.10GR U$7.13GL U$7.13GR U$7.16GL U$7.16GR U$7.19GL U$7.19GR U$7.22GL U$7.22GR U$8.1GL U$8.1GR U$8.4GL U$8.4GR U$8.7GL U$8.7GR U$8.10GL U$8.10GR U$8.13GL U$8.13GR U$8.16GL U$8.16GR U$8.19GL U$8.19GR U$8.22GL U$8.22GR U$31.3 U$31.4 U$32.3 U$32.4 U$37.- USB1.5 VCC.1
HUBRESET: R34.1 U1.6
L: L.2 U2.41
LED1: R41.1 U2.24
LED2: R42.1 U2.29
LED3: R43.1 U2.30
LED4: R44.1 U2.31
LED5: R45.1 U2.32
MISO: D24.2 R78.2 U2.28 U$1.2SR U$2.2SR U$3.2SR U$4.116 U$5.2SR U$6.2SR U$7.2SR U$8.2SR
MODE: R2.2 U1.48
MOSFET_GATE: OPTO1.4 R67.P$2
MOSI: D23.3 R76.2 U2.25 U$1.3SR U$2.3SR U$3.3SR U$4.118 U$5.3SR U$6.3SR U$7.3SR U$8.3SR
N$12: D20.C D21.A R36.P$1
N$14: U1.7
N$16: U1.40
N$19: D11.C D17.A R38.P$1
N$20: R64.P$1 R67.P$1 U$30.4
N$23: OPTO1.1 R70.P$2
N$33: D11.A D17.C NOT1.4
N$39: D20.A D21.C NOT2.4
N$42: LED5.A R45.2
N$43: LED4.A R44.2
N$44: LED3.A R43.2
N$45: U1.41
N$47: U1.42
N$48: U1.1
N$53: LED2.A R42.2
N$54: LED1.A R41.2
N$57: 3.3V.3 C39.P$1
N$58: 3.3V.4 C40.P$2
N$59: 3.3V.9 C41.P$2 R53.P$2 R54.P$2
N$61: 3.3V.1 3.3V.2 C39.P$2 L1.1
N$62: D2.C D9.2 R81.P$2
N$63: D3.C D5.2 R66.P$2
N$64: 5V.3 C55.P$1
N$65: 5V.4 C51.P$2
N$66: 5V.9 C44.P$2 R68.P$2 R69.P$2
N$67: 5V.1 5V.2 C55.P$2 L2.P$2
N$68: D1.C D6.2 R72.P$2
N$69: D8.C R82.P$2
N$70: D4.C R65.P$2
N$71: D7.C R73.P$2
OC: R35.2 U1.12 U1.16 U1.20 U1.25 U1.29 U1.33 U1.37
PB1: C80.1 R39.P$1 U2.16 U$31.1 U$31.2
PB2: C81.1 R37.P$2 U2.37 U$32.1 U$32.2
PBLED2: NOT2.2 R36.P$2 U2.48
PGND: U$7.14SL U$7.15SL U$7.17SL U$7.18SL U$8.14SL U$8.15SL U$8.17SL U$8.18SL U$11.- U$12.- U$13.- U$14.- U$16.- U$17.-
PRE_VCC: 3.1 C84.2 CS0.3 CS0.4 D2.A R47.1 U$26.P$1
PWRLED: NOT1.2 R38.P$2 U2.20
S: D9.1 R64.P$2 U$26.P$2 U$30.1 U$30.2 U$30.3
SAMD_N [Differential]: D22.2 U2.33 USB1.2
SAMD_P [Differential]: D22.3 U2.34 USB1.3
SAMRST: CN1.10 R40.2 U2.40
SAMXIN: C83.2 U2.1 X2.P$2
SAMXOUT: C82.2 U2.2 X2.P$1
SCK: D23.2 R74.2 U2.26 U$1.5SR U$2.5SR U$3.5SR U$4.119 U$5.5SR U$6.5SR U$7.5SR U$8.5SR
SCL: D25.3 R80.1 U2.22 U$1.8SR U$2.8SR U$3.8SR U$4.113 U$5.8SR U$6.8SR U$7.8SR U$8.8SR
SDA: D25.2 R84.1 U2.21 U$1.9SR U$2.9SR U$3.9SR U$4.115 U$5.9SR U$6.9SR U$7.9SR U$8.9SR
SS0: U2.27 U$4.59
SS1: R52.2 R55.2 R71.1 R71.2 U$4.16 U$7.6SR
SS2: R62.2 R63.2 R77.1 R77.2 U$4.122 U$8.6SR
SS3: R56.2 R57.2 R75.1 R75.2 U$4.2 U$5.6SR
SS4: R48.2 R49.2 R85.1 R85.2 U$4.136 U$6.6SR
SS5: R60.2 R61.2 R79.1 R79.2 U$1.6SR U$4.76
SS6: R50.2 R51.2 R83.1 R83.2 U$2.6SR U$4.105
SS7: R58.2 R59.2 R87.1 R87.2 U$3.6SR U$4.62
STANDBY_3.3V: 3.5 C52.2 C53.2 C76.2 C77.2 C85.2 CN1.1 D22.4 MAIN.P$2 NOT1.5 R37.P$1 R39.P$2 R40.1 U2.6 U2.17 U2.36 U2.44
STDBY3V3: C16.1 U$4.162 U$4.163
SWDCLK: CN1.4 U2.45
SWDIO: CN1.2 U2.46
SWMAIN: MAIN.P$1 R70.P$1 U2.38
VBAT: C75.2 D26.3 R46.1 R47.2 U2.13
VBUS: USB1.1
VCC: 3.3V.12 3.3V.13 3.3V.14 5V.12 5V.13 5V.14 C18.1 C45.+ C46.P$2 C49.+ C54.P$2 C56.2 C59.+ C60.+ C61.+ CS1.3 CS1.4 CS2.3 CS2.4 CS3.3 CS3.4 CS4.3 CS4.4 CS5.3 CS5.4 CS6.3 CS6.4 D8.A TVS2.2 U$3.2SL U$3.3SL U$3.5SL U$3.6SL U$4.159 U$4.160 U$11.+ U$12.+ U$13.+ U$14.+ U$16.+ U$17.+ U$30.5 U$30.6 U$30.7 U$30.8 U$30.EP
VCC3: C58.P$2 D1.A FUSE2.2 L2.P$1 TVS3.1
VCC_1: CS1.1 CS1.2 U$7.2SL U$7.3SL U$7.5SL U$7.6SL
VCC_2: CS2.1 CS2.2 U$8.2SL U$8.3SL U$8.5SL U$8.6SL
VCC_3: CS3.1 CS3.2 U$5.2SL U$5.3SL U$5.5SL U$5.6SL
VCC_4: CS4.1 CS4.2 U$6.2SL U$6.3SL U$6.5SL U$6.6SL
VCC_5: CS5.1 CS5.2 U$1.2SL U$1.3SL U$1.5SL U$1.6SL
VCC_6: CS6.1 CS6.2 U$2.2SL U$2.3SL U$2.5SL U$2.6SL
XIN: 6MHZ.P$1 C21.2 U1.45
XOUT: 6MHZ.P$3 C22.2 U1.44

## Tracks (layer width: path | path; a pad name or v marks a point on that pad's centre or on a via)
+3V1  (via drill 0.25 pad 0.6)
  S1 0.2: D3.A 78.1,81.1 v78,81
  S2 0.2: v78,81 78,73 v80,71
  pour S1 (rank 4, no thermals): 81.1,74.5 84.4,74.5 84.4,67 83.8,66.4 74.5,66.4 71.5,69.4 71.5,72.1 81.1,72.1
+3V3  (via drill 0.25 pad 0.6, 0.6 pad 1)
  S1 0.15: R34.2 v102.7,139.9 | 75.22,51.38 C42.P$2 | C41.P$1 85,47.8 | D16.4 98.55,69.45 v99.1,69.4 | U1.9 104.25,144.3 C37.2 | D10.4 37.75,99.55 v37.9,99.4 | R49.1 v133.3,157.6 | R50.1 v141.4,80.2 | R51.1 104.85,131.15 v105.7,130.3 | R52.1 v45.1,127.9 | R55.1 70.5,158 v70.6,157.9 | R56.1 v40,87.1 | R57.1 v70.6,143.5 | R58.1 v96.7,54.7 | R59.1 115.8,120.3 115.9,120.4 v115.9,120.7 | R60.1 48.95,44.55 50.5,43 57.7,43 59.3,44.6 v59.3,47 | R61.1 v99.4,114.4 | R62.1 v130,171.7 | R63.1 v151,171.1 | R48.1 v165.7,129.1 | CS2.8 166.19,142.8 166.3,142.9 166.3,144.65 C88.1 166.35,147.35 163.6,150.1 v162.1,150.1 | 52,140.5 52,141.4 v52.3,141.7 | C86.1 41.73,163.65 CS1.8 42.8,163.5 47.8,158.5 v51.4,158.5 | NOT2.5 124.35,139.6 v123.7,139.6
  S1 0.2: 3.3V.5 75.22,51.38 | C42.P$2 74.6,51.5 74.5,51.4 72.7,51.4 71.8,52.3 71,53.1 71,76.1 71.5,76.6 | R54.P$1 C41.P$1 v85,47 | CS0.8 C47.P$2 98.7,35.6 98.5,35.8 v98.5,36.4 | D14.4 163,112.6 v162.4,112 | U1.46 95.45,149.45 94.6,148.6 94.6,146.98 C36.2 95.59,145.81 v95.8,145.6 | R1.1 v96.4,148.3 | D19.4 98.2,134.8 97.9,134.8 97.3,135.4 v97.3,136.6 | R35.1 R32.1 v105.7,139.9 | D18.4 52.75,59.35 v52.9,59.2 | C19.2 94.6,151.6 v94.3,151.3 | v168.4,96.4 170.09,94.7 CS4.8 170.2,94.32 170.2,96.4 170.5,96.7 C92.1
  S1 0.3: D12.4 52,140.5 | C38.2 v107.2,157.9 | R32.1 105.7,140.5 105.4,140.2 | C37.2 104.45,143.85 v104.8,143.5 | CS3.8 20.25,121.76 C87.1 20.25,120.65 22.3,118.6 29.5,118.6 v31.3,116.8 | CS5.8 34.7,72.86 C89.1 34.85,70.6 40,70.6 40.9,69.7 v42.4,69.7 | C91.1 163.15,53.6 CS6.8 159.81,53.6 160,53.8 161.8,53.8 164.8,56.8 164.8,65.5 163.6,66.7 158.5,66.7 v156.4,68.8 | R80.2 v86.8,140.2 | R84.2 v88.6,139 | D23.4 89.9,130.2 v90.1,130 | D24.4 93.2,130.2 v93.4,130 | D25.4 96.5,130.5 v97,130
  S1 0.5: U$4.154 120.7,166.2 | 120.7,166.2 120.25,166.2 C17.1 | 121.5,167 120.7,166.2 | 56.2,157.9 56.5,158.2 | D15.4 147.35,71.75 v147.1,71.5 | D13.4 147.15,155.55 v147.1,155.5
  other vias: 73.2,80.5 74.4,79.3 74.4,80.5 73.2,78.1 72,79.3 72,78.1 72,80.5 73.2,79.3 74.4,78.1 31,110.5 31,109.6 166.6,104.8 166.6,102.4 166.6,103.6 151.5,62.9 151.5,62 42.4,67.9 42.4,68.8 43.3,67.9 43.3,68.8 43.3,69.7 44.2,150.7 45.1,150.7 46,150.7 114.4,169.3 114.4,168.4 114.4,167.5 160.9,146.2 161.8,146.2 162.4,146.2 31,111.4 83.5,156.4 84.4,156.4 83.8,155.8
  pour S1 (rank 2, no thermals): 55.6,76.9 55.6,75.1 57.1,75.1 57.1,76.6 56.8,76.9 56.8,78.4 56.2,78.4 56.2,77.5
  pour S1 (rank 2, no thermals): 40.6,118 40.6,116.2 42.1,116.2 42.1,117.7 41.8,118 41.8,119.5 41.2,119.5 41.2,118.6
  pour S1 (rank 2, no thermals): 101.8,88.3 101.8,86.5 103.3,86.5 103.3,88 103,88.3 103,89.8 102.4,89.8 102.4,88.9
  pour S1 (rank 2, no thermals): 55.6,159.1 55.6,157.3 57.1,157.3 57.1,158.8 56.8,159.1 56.8,160.6 56.2,160.6 56.2,159.7
  pour S1 (rank 4, no thermals): 144.4,136.9 144.4,138.7 142.9,138.7 142.9,137.2 143.2,136.9 143.2,135.4 143.8,135.4 143.8,136.3
  pour S1 (rank 2, no thermals): 159.4,96.1 159.4,97.9 157.9,97.9 157.9,96.4 158.2,96.1 158.2,94.6 158.8,94.6 158.8,95.5
  pour S1 (rank 2, no thermals): 144.4,54.7 144.4,56.5 142.9,56.5 142.9,55 143.2,54.7 143.2,53.2 143.8,53.2 143.8,54.1
  pour S1 (rank 5, no thermals): 71.5,88.3 71.5,76.6 84.4,76.6 84.4,79.6 85,80.2 97.3,80.2 103.6,86.5 103.6,88.3 103,88.9 102.7,88.9 100.3,86.5 84.4,86.5 82,88.9 72.1,88.9
  pour VCC (rank 3, no thermals): 145,183.08 55,183.08 arc298
  pour S1 (rank 2, no thermals): 151,63.4 162.4,63.4 163.3,62.5 163.3,57.7 161.8,56.2 145,56.2 144.4,55.6 142.9,55.6 142.6,55.9 142.6,56.8 144.7,58.9 151,58.9
  pour S1 (rank 2, no thermals): 165.7,106.3 174.1,106.6 178,104.2 178,99.4 176.5,97.9 159.7,97.9 159.1,97.3 157.6,97.3 157.3,97.6 157.3,98.5 159.4,100.6 165.7,100.6
  pour S1 (rank 2, no thermals): 151.9,148.6 164.2,148.6 165.1,147.7 165.1,143.8 162.7,141.4 149.8,141.4 146.8,138.4 142.3,138.4 142.3,141.1 145.6,144.1 151.9,144.1
  pour S1 (no thermals): 114.1,169.9 116.8,169.9 119.5,167.2 122.5,167.2 122.5,166 120.4,166 120.1,165.7 118.3,165.7 116.8,167.2 113.8,167.2 113.8,169.6
  pour S1 (rank 5, no thermals): 41.5,70.9 41.5,66.4 49.3,66.4 57.4,74.5 57.4,75.1 45.7,75.1 44.5,73.9
  pour S1 (rank 5, no thermals): 29.2,115.3 29.2,107.8 34,107.8 42.1,115.9 42.1,116.5 30.4,116.5
  pour S1 (rank 5, no thermals): 41.8,155.5 41.8,150.1 43.6,148.3 52,148.3 57.7,154 57.7,157.3 43.3,157.3
  pour S1 (no thermals): 82.3,156.7 82.3,154.3 85,154.3 85,156.7
+5V  (via drill 0.25 pad 0.6, 0.6 pad 1)
  S1 0.15: C44.P$1 R69.P$1 120.9,49.8 120.1,49 109.3,49 109,49.3 109,53.2 | C50.P$2 112.5,53.15 5V.5 110.78,53.17 110.5,52.9 109.3,52.9 109,53.2 | 109,53.2 109,57.1 | U$4.156 121.87,164.6
  S1 0.2: 38.8,67.6 37,67.6
  S1 0.3: C57.+ 154.8,144.15 | C63.+ 160.05,101.25 157.3,98.5 157.3,97 | 141.7,56.5 141.7,56.15 C10.2 | C67.+ 87.4,80.8 | 57.7,75.4 57.7,74.5 49.3,66.1 39.4,66.1 38.8,66.7 38.8,67.6 38.8,68.25 C70.+ | 24.1,110.2 C71.+ 23.5,109.95
  S1 0.5: 121.52,164.25 U$4.157 | 121.87,164.6 121.84,164.56 121.52,164.25 | C74.+ 38.5,153.4 43.6,148.3 52,148.3 57.7,154 57.7,158.15 C1.2 | 141.7,56.5 144.45,59.25 C65.+ 151.95,60.7 v149.8,60.7 | 87.4,80.8 88.3,79.9 97.3,79.9 103.9,86.2 103.9,86.8 | 24.1,110.2 25.9,108.4 34.65,108.4 C3.2 | v30.9,107.5 24.7,107.5 23.5,108.7 23.5,109.95 | v42.1,147.1 37.6,151.6 C74.+ | 37.6,153.75 C74.+ | v104.2,83.5 102.4,83.5 97.9,79 86.5,79 85.6,79.9 85.6,81.1 v86.2,81.7 | 121.52,164.25 121.47,164.2 119.5,164.2 117.4,162.1 v116.5,162.1 116.45,162.05 C15.1 | 154.8,144.15 148.25,144.15 | 148.25,144.15 145.35,144.15 142.3,141.1 142.3,138.4 | 148.25,144.15 v147.7,144.7
  S2 0.2: 37,61.6 37,67.4 v36.7,67.7 | v170.6,100.9 170.6,89.6 170.2,89.2
  S2 0.3: 29.8,91 29.8,106.4 v30,106.6
  S2 0.5: v113.5,75.4 112.3,75.4 v104.2,83.5 | v149.8,60.7 150.7,60.7 151.45,59.95 | v116.5,162.1 130.3,162.1 v147.7,144.7
  S2 1: v42.1,146.2 40.6,146.2 29.8,135.4 29.8,91 37,83.8 37,61.6 52.9,45.7 107.5,45.7 | 107.5,45.7 124,45.7 131.5,53.2 144.7,53.2 151.45,59.95 160.6,69.1 160.6,78.7 170.2,88.3 170.2,89.2 170.2,126.4 157.6,139 v157.6,143.8 | v113.5,75.4 113.5,72.7 107.5,66.7 107.5,45.7
  other vias: 112.3,73 112.3,74.2 114.7,76.6 114.7,75.4 114.7,74.2 113.5,74.2 113.5,73 114.7,73 37.6,68.6 156.7,143.8 157.6,144.7 169.7,100.9 169.7,101.8 170.6,101.8 148.9,60.7 85.3,82.6 86.2,82.6 85.3,81.7 37.6,67.7 36.7,68.6 30.9,106.6 30,107.5 41.2,147.1 41.2,146.2
  pour S1 (no thermals): 57.1,78.4 57.1,76.9 57.4,76.6 57.4,75.1 58.9,75.1 58.9,76 57.7,77.2 57.7,78.4
  pour S1 (no thermals): 42.1,119.5 42.1,118 42.4,117.7 42.4,116.2 43.9,116.2 43.9,117.1 42.7,118.3 42.7,119.5
  pour S1 (no thermals): 103.3,89.8 103.3,88.3 103.6,88 103.6,86.5 105.1,86.5 105.1,87.4 103.9,88.6 103.9,89.8
  pour S1 (no thermals): 57.1,160.6 57.1,159.1 57.4,158.8 57.4,157.3 58.9,157.3 58.9,158.2 57.7,159.4 57.7,160.6
  pour S1 (no thermals): 142.9,135.4 142.9,136.9 142.6,137.2 142.6,138.7 141.1,138.7 141.1,137.8 142.3,136.6 142.3,135.4
  pour S1 (no thermals): 157.9,94.6 157.9,96.1 157.6,96.4 157.6,97.9 156.1,97.9 156.1,97 157.3,95.8 157.3,94.6
  pour S1 (no thermals): 142.9,53.2 142.9,54.7 142.6,55 142.6,56.5 141.1,56.5 141.1,55.6 142.3,54.4 142.3,53.2
  pour S1 (rank 2, no thermals): 120.7,78.1 120.7,74.8 116.5,74.8 116.5,64.6 109,57.1 109,80.2 112.6,83.8 125.2,83.8 130.9,78.1
  pour S1 (no thermals): 160,143.2 160,145.3 154.6,145.3 154.6,142.9 159.7,142.9
  pour S1 (no thermals): 173.3,100 173.3,102.4 167.8,102.4 167.8,100
  pour S1 (no thermals): 150.4,60.1 150.4,61.3 148.6,61.3 148.6,60.1
  pour S1 (no thermals): 85,82.9 85,80.5 88,80.5 88,82.9
  pour S1 (no thermals): 36.4,69.2 36.4,67.1 38.5,67.1 38.5,69.2
  pour S1 (no thermals): 31.5,107.8 29.1,107.8 29.1,106 31.5,106
  pour S1 (no thermals): 42.4,145.3 42.4,147.7 40.6,147.7 40.6,145.3
  pour S2 (no thermals): 42.4,145.3 42.4,147.7 40.6,147.7 40.6,145.3
  pour S2 (rank 2, no thermals): 31.5,107.8 29.1,107.8 29.1,106 31.5,106
  pour S2 (no thermals): 150.4,60.1 150.4,61.3 148.6,61.3 148.6,60.1
  pour S2 (no thermals): 160,143.2 160,145.3 154.6,145.3 154.6,142.9 159.7,142.9
  pour S2 (rank 2, no thermals): 38.5,69.2 38.5,67.1 36.4,67.1 36.4,69.2
  pour S2 (no thermals): 110.5,72.7 110.5,73.6 114.1,77.2 115.3,77.2 115.3,72.7 115,72.4 110.8,72.4
BAT
  S1 0.3: CS0.1 CS0.2
  pour S1 (rank 2, no thermals): 90.7,31.9 90.7,20.8 100.3,20.8 100.3,31.9
BUSPWR
  S1 0.15: U1.10 104.75,145.65 105.7,144.7 R32.2
BUZZER  (via drill 0.25 pad 0.6)
  S1 0.15: U2.3 100.25,174.45 100.3,174.4 v101.8,174.4
  S2 0.15: v101.8,174.4 101.8,178.9 104.2,181.3 118,181.3 120.2,179.1 138.43,179.1 JP1.2
CURRENT1  (via drill 0.25 pad 0.6)
  S1 0.15: CS1.7 42.97,164.76 43.6,165.4 43.6,171.1 46.6,174.1 53.8,174.1 54.7,173.2 v57.7,173.2 | v83.8,178.3 v88.9,178.3 | U2.12 100.65,178.95 v101.2,179.5
  S2 0.15: v57.7,173.2 61.6,173.2 65.2,176.8 79,176.8 79.9,175.9 81.7,175.9 83.8,178 v83.8,178.3 | v88.9,178.3 89.5,178.9 91,178.9 91.6,178.3 100,178.3 v101.2,179.5
CURRENT2  (via drill 0.25 pad 0.6)
  S1 0.15: CS2.7 167.47,142.19 arc-45 167.09,141.29 166.9,141.1 163.9,141.1 v163.6,141.4 | U2.8 101.65,176.95 102.7,178 105.4,178 108.4,175 121.6,175 v121.9,174.7
  S2 0.15: v163.6,141.4 163.3,141.7 163.3,161.8 157.3,167.8 140.5,167.8 134.2,174.1 122.5,174.1 v121.9,174.7
CURRENT3  (via drill 0.25 pad 0.6)
  S1 0.15: CS3.7 19.94,123.66 19.3,124.3 19.3,135.1 21.1,136.9 25,136.9 32.5,144.4 32.5,160.6 46.3,174.4 53.8,174.4 54.7,175.3 54.7,177.4 v54.1,178 | U2.14 98.95,179.95 v100,181
  S2 0.15: v100,181 99.7,181.3 82.6,181.3 80.2,178.9 64.3,178.9 v63.4,179.8 62.8,180.4 56.5,180.4 v54.1,178
CURRENT4  (via drill 0.25 pad 0.6)
  S1 0.15: CS4.7 171.37,95.47 v171.4,95.5 | U2.7 101.75,176.45 103,177.7 105.1,177.7 108.1,174.7 120.7,174.7 v121.6,173.8
  S2 0.15: v171.4,95.5 172.3,96.4 172.3,119.8 173.5,121 173.5,127.3 163,137.8 163,161.5 157,167.5 140.2,167.5 133.9,173.8 v121.6,173.8
CURRENT5  (via drill 0.25 pad 0.6)
  S1 0.15: CS5.7 33.44,75.97 32.8,76.6 21.7,76.6 21.4,76.9 21.4,117.7 19,120.1 19,135.4 20.8,137.2 24.7,137.2 32.2,144.7 32.2,160.9 46,174.7 52.9,174.7 v53.8,175.6 | v98.8,180.7 98.8,180.4 98.45,180.05 U2.15
  S2 0.15: v98.8,180.7 98.5,181 82.9,181 80.5,178.6 63.7,178.6 62.2,180.1 56.8,180.1 54.7,178 54.7,176.5 v53.8,175.6
CURRENT6  (via drill 0.25 pad 0.6)
  S1 0.15: CS6.7 158.47,52.34 157.9,52.9 157.9,54.4 159.1,55.6 162.1,55.6 164.2,57.7 164.2,65.2 163.6,65.8 144.1,65.8 v142.9,67 | v118.3,129.7 115,133 v115,145.6 | v120.7,175.6 120.7,175.9 120.1,176.5 118.3,176.5 117.7,175.9 109.3,175.9 106.3,178.9 101.8,178.9 101.35,178.45 U2.11
  S2 0.15: v142.9,67 142.6,67 128.8,80.8 128.8,89.8 121.3,97.3 121.3,126.7 v118.3,129.7 | v115,145.6 115,169.9 v120.7,175.6
CURRENT_MAIN  (via drill 0.25 pad 0.6)
  S1 0.15: CS0.7 99.97,33.67 99.4,34.23 99.4,36.7 98.5,37.6 98.5,49.3 99.4,50.2 v99.4,50.3 | v97,127.6 97,128.2 97.6,128.8 97.6,133.3 95.8,135.1 v95.8,136.9 | v118.9,175.6 118.6,175.3 108.7,175.3 105.7,178.3 102.4,178.3 101.55,177.45 U2.9
  S2 0.15: v99.4,50.3 99.4,62.5 95.2,66.7 95.2,71.2 95.8,71.8 95.5,72.1 95.5,92.8 97,94.3 v97,127.6 | v95.8,136.9 95.8,143.2 97.3,144.7 97.3,154 v118.9,175.6
D
  S1 0.15: U2.43 96.95,172.05 97.3,171.7 97.3,169.95 D.2
D0_N
  S1 0.3: U$4.106 99.6,125.53 99.42,125.7 99.42,135.7 100.2,136.47 D19.2 99.42,137.32 99.42,138.71 101.72,141.01 101.72,146.2 101.75,146.22 U1.4
D0_P
  S1 0.3: U$4.107 98.8,125.53 98.97,125.7 98.97,135.7 98.2,136.47 D19.3 98.97,137.32 98.97,138.89 99.84,139.76 | 99.84,139.76 101.28,141.19 101.28,146.2 101.25,146.22 U1.3 | R31.1 99.67,139.94 99.84,139.76
D1.1
  S1 0.15: U$4.24 70.5,163.8 66.1,159.4 66.1,152.2 58.3,144.4 47.8,144.4 45.8,142.4 U$7.21SR
D1.2
  S1 0.15: U$4.22 69.5,162.2 66.4,159.1 66.4,151.9 58.6,144.1 48.4,144.1 46.6,142.3 U$7.20SR
D1.3_N
  S1 0.15: U$4.21 69.3,161.4 66.7,158.8 66.7,151.6 58.9,143.8 49.3,143.8 48.2,142.7 U$7.18SR
D1.4_P
  S1 0.15: U$4.19 68.3,159.8 67,158.5 67,151.3 59.2,143.5 49.6,143.5 49,142.9 U$7.17SR
D1.5
  S1 0.15: U$4.18 68.1,159 67.3,158.2 67.3,151 61.6,145.3 61.6,141.7 59.8,139.9 53.8,139.9 53,139.1 U$7.12ER
D1.6
  S1 0.15: U$4.25 70.7,164.6 65.8,159.7 65.8,152.5 58,144.7 47.5,144.7 44.2,141.4 44.2,130.77 U$7.11ER
D1.7
  S1 0.15: U$4.27 71.3,166.2 70.9,166.6 63.1,166.6 63,166.5 U$7.12EL
D1.8
  S1 0.15: U$7.20SL 56.6,166.7 56.8,166.9 70.9,166.9 71.1,167 U$4.28
D1.9
  S1 0.15: U$4.30 70.2,168.6 68.8,167.2 56.5,167.2 55.8,166.5 U$7.21SL
D1__N  (1 unrouted)
  S1 0.3: U1.30 103.25,155.78 103.22,155.8 103.22,156.29 95.26,164.26 95.16,164.36 94.46,165.06 94.46,166.14 94.42,166.18 | R11.1 C33.1
D1__P
  S1 0.3: U1.31 102.75,155.78 102.78,155.8 102.78,156.11 94.11,164.77 C28.1 R12.2
D1_N  (via drill 0.25 pad 0.6)
  S1 0.3: U$7.15SR 50.6,136.82 50.77,137 50.77,137.5 50.04,138.24 50,138.28 D12.2 50,138.82 50.77,139.6 50.77,142.7 v50.62,142.7 | R11.2 R26.1 89.7,169.72 88.99,170.43 84.79,170.43 79.09,176.12 66.61,176.12 63.48,172.99 63.48,171.7 v63.33,171.7
  S2 0.3: v63.33,171.7 63.48,171.7 63.48,170.29 55.38,162.19 55.38,149.29 50.77,144.69 50.77,142.7 v50.62,142.7
D1_P  (via drill 0.25 pad 0.6)
  S1 0.3: U$7.14SR 51.4,136.82 51.23,137 51.23,137.5 52,138.28 D12.3 52,138.82 51.23,139.6 51.23,142.7 v51.38,142.7 | R12.1 R25.1 89.4,169.38 88.81,169.97 84.61,169.97 78.91,175.68 66.79,175.68 63.92,172.81 63.92,171.7 v64.08,171.7
  S2 0.3: v64.08,171.7 63.92,171.7 63.92,170.11 55.83,162.01 55.83,149.11 51.23,144.51 51.23,142.7 v51.38,142.7
D2.1
  S1 0.15: U$4.129 132.6,162.2 145.3,149.5 152.5,149.5 153.7,150.7 153.7,153.4 154.2,153.9 U$8.21SR
D2.2
  S1 0.15: U$4.128 132.4,163 145.6,149.8 152.2,149.8 153.4,151 U$8.20SR
D2.3_N
  S1 0.15: U$8.18SR 151.8,154.7 153.1,153.4 153.1,151.3 151.9,150.1 145.9,150.1 132.4,163.6 130.9,163.6 129.9,164.6 U$4.126
D2.4_P
  S1 0.15: U$8.17SR 151,154.9 152.8,153.1 152.8,151.6 151.6,150.4 146.2,150.4 132.7,163.9 131.2,163.9 129.7,165.4 U$4.125
D2.5
  S1 0.15: 147,159.9 U$8.12ER 146.97,160 146.97,159.27 146.8,159.1 145.6,159.1 140.5,164.2 131.5,164.2 128.7,167 U$4.123
D2.6
  S1 0.15: U$4.131 133.6,160.6 145,149.2 152.8,149.2 154,150.4 154,153.1 155.8,154.9 155.8,165.23 U$8.11ER
D2.7
  S1 0.15: U$4.132 133.8,159.8 134.5,159.1 134.5,156.4 132.7,154.6 132.7,132.1 135.1,129.7 136.73,129.7 U$8.12EL
D2.8
  S1 0.15: U$4.134 129.1,158.2 130.3,159.4 133.6,159.4 134.2,158.8 134.2,156.7 132.4,154.9 132.4,131.8 137.2,127 142.9,127 143.5,127.6 143.5,129.87 U$8.20SL
D2.9
  S1 0.15: U$4.135 128.9,157.4 130.6,159.1 133.3,159.1 133.9,158.5 133.9,157 132.1,155.2 132.1,131.5 136.9,126.7 143.5,126.7 144.2,127.4 U$8.21SL
D2__N
  S1 0.3: U1.26 105.25,155.97 105.22,156 105.22,158.36 105.41,158.55 | R9.1 C34.1 105.41,158.55 | 105.41,158.55
D2__P
  S1 0.3: U1.27 104.75,155.97 104.78,156 104.78,158.38 104.76,158.4 104.56,158.62 C27.1 R10.2
D2_N  (via drill 0.25 pad 0.6)
  S1 0.3: U$8.15SR 149.4,159.9 149.36,159.86 149.36,159.23 149.22,159.1 149.22,158.3 149.95,157.57 D13.2 149.12,156.62 149.12,154.6 v149.28,154.6 | R9.2 R24.1 105.21,164.97 105.21,167.89 109.69,172.38 126.4,172.38 v126.4,172.22
  S2 0.3: v126.4,172.22 126.4,172.38 133.81,172.38 138.47,167.71 138.47,157.51 143.11,152.88 148.09,152.88 149.12,153.91 149.12,154.6 v149.28,154.6
D2_P  (via drill 0.25 pad 0.6)
  S1 0.3: U$8.14SR 148.6,159.28 148.78,159.1 148.78,158.3 147.95,157.47 D13.3 148.68,156.72 148.68,154.6 v148.53,154.6 | R10.1 R23.1 104.76,164.9 104.76,168.08 109.51,172.82 126.4,172.82 v126.4,172.97
  S2 0.3: v126.4,172.97 126.4,172.82 133.99,172.82 138.93,167.89 138.93,157.69 143.29,153.32 147.91,153.32 148.68,154.09 148.68,154.6 v148.53,154.6
D3.1
  S1 0.15: U$4.9 70.8,151.8 70.3,151.3 70.3,150.4 63.4,143.5 63.4,136 52.6,125.2 52.6,113.8 42.7,103.9 35.2,103.9 30.8,99.5 U$5.21SR
D3.2
  S1 0.15: U$4.8 71.5,151 63.7,143.2 63.7,135.7 52.9,124.9 52.9,113.5 42.7,103.3 35.2,103.3 31.6,99.7 U$5.20SR
D3.3_N
  S1 0.15: U$4.6 70.5,149.4 64,142.9 64,135.4 53.2,124.6 53.2,113.2 42.7,102.7 35.2,102.7 33.2,100.7 U$5.18SR
D3.4_P
  S1 0.15: U$4.5 70.3,148.6 64.3,142.6 64.3,135.1 53.5,124.3 53.5,112.9 42.7,102.1 35.2,102.1 34,100.9 U$5.17SR
D3.5
  S1 0.15: U$4.3 69.3,147 64.6,142.3 64.6,134.8 53.8,124 53.8,112.6 38,96.8 U$5.12ER
D3.6
  S1 0.15: U$4.11 71.2,153.4 70,152.2 70,150.7 63.1,143.8 63.1,136.3 52.3,125.5 52.3,114.1 42.7,104.5 35.2,104.5 29.5,98.8 29.5,94 30,93.5 U$5.11ER
D3.7
  S1 0.15: U$5.12EL 48,125.4 48.4,125.8 52,125.8 62.8,136.6 62.8,144.1 68.95,150.25 69.4,150.7 69.4,152.5 71.1,154.2 U$4.12
D3.8
  S1 0.15: U$5.20SL 41.6,125.6 42.4,126.4 52,126.4 62.5,136.9 62.5,144.4 68.8,150.7 68.8,153.1 71.5,155.8 U$4.14
D3.9
  S1 0.15: U$4.15 71.2,156.6 68.2,153.6 68.2,150.7 62.2,144.7 62.2,137.2 51.7,126.7 42.1,126.7 40.8,125.4 U$5.21SL
D3__N  (1 unrouted)
  S1 0.3: U1.34 101.25,156.37 100.09,157.53 | R14.2 C31.1 89.52,160.3 90.49,159.32 98.29,159.32 100.16,157.46
D3__P  (1 unrouted)
  S1 0.3: R13.2 C29.1 89.26,159.92 90.31,158.88 98.11,158.88 99.84,157.14 | U1.35 100.75,156.23 99.91,157.07
D3_N  (via drill 0.25 pad 0.6)  (1 unrouted)
  S1 0.3: U$5.15SR 35.6,95.92 35.78,96.1 35.78,96.6 35,97.38 D10.2 | 35,97.72 35.78,98.5 35.78,100.6 v35.62,100.6 | R14.1 R28.1 84.91,164.91 84.03,165.79 84.03,169.39 78.49,174.93 69.01,174.93 67.38,173.29 67.38,171.7 v67.22,171.7
  S2 0.3: v35.62,100.6 35.78,100.6 35.78,136.59 39.31,140.12 53.11,140.12 57.77,144.79 57.77,161.59 67.38,171.19 67.38,171.7 v67.22,171.7
D3_P  (via drill 0.25 pad 0.6)  (1 unrouted)
  S1 0.3: U$5.14SR 36.4,95.92 36.23,96.1 36.23,96.6 37,97.38 D10.3 | 37,97.72 36.23,98.5 36.23,100.6 v36.38,100.6 | R13.1 R27.1 84.57,164.61 83.58,165.61 83.58,169.21 78.31,174.47 69.19,174.47 67.83,173.11 67.83,171.7 v67.97,171.7